# Altium PCB NIC.PCBDOC (part 1 of 2)
Units mil, origin at the board's own origin, x right, y up, seen from the top; angles counter-clockwise.
Board outline 6450 x 3500 mil, 6 copper layers (Top Layer, Internal Plane 1, MidLayer1, MidLayer2, Internal Plane 2, Bottom Layer); 176 components, 198 nets, 890 pads, 410 vias.
Unrouted connection lines stored in the file: 18.
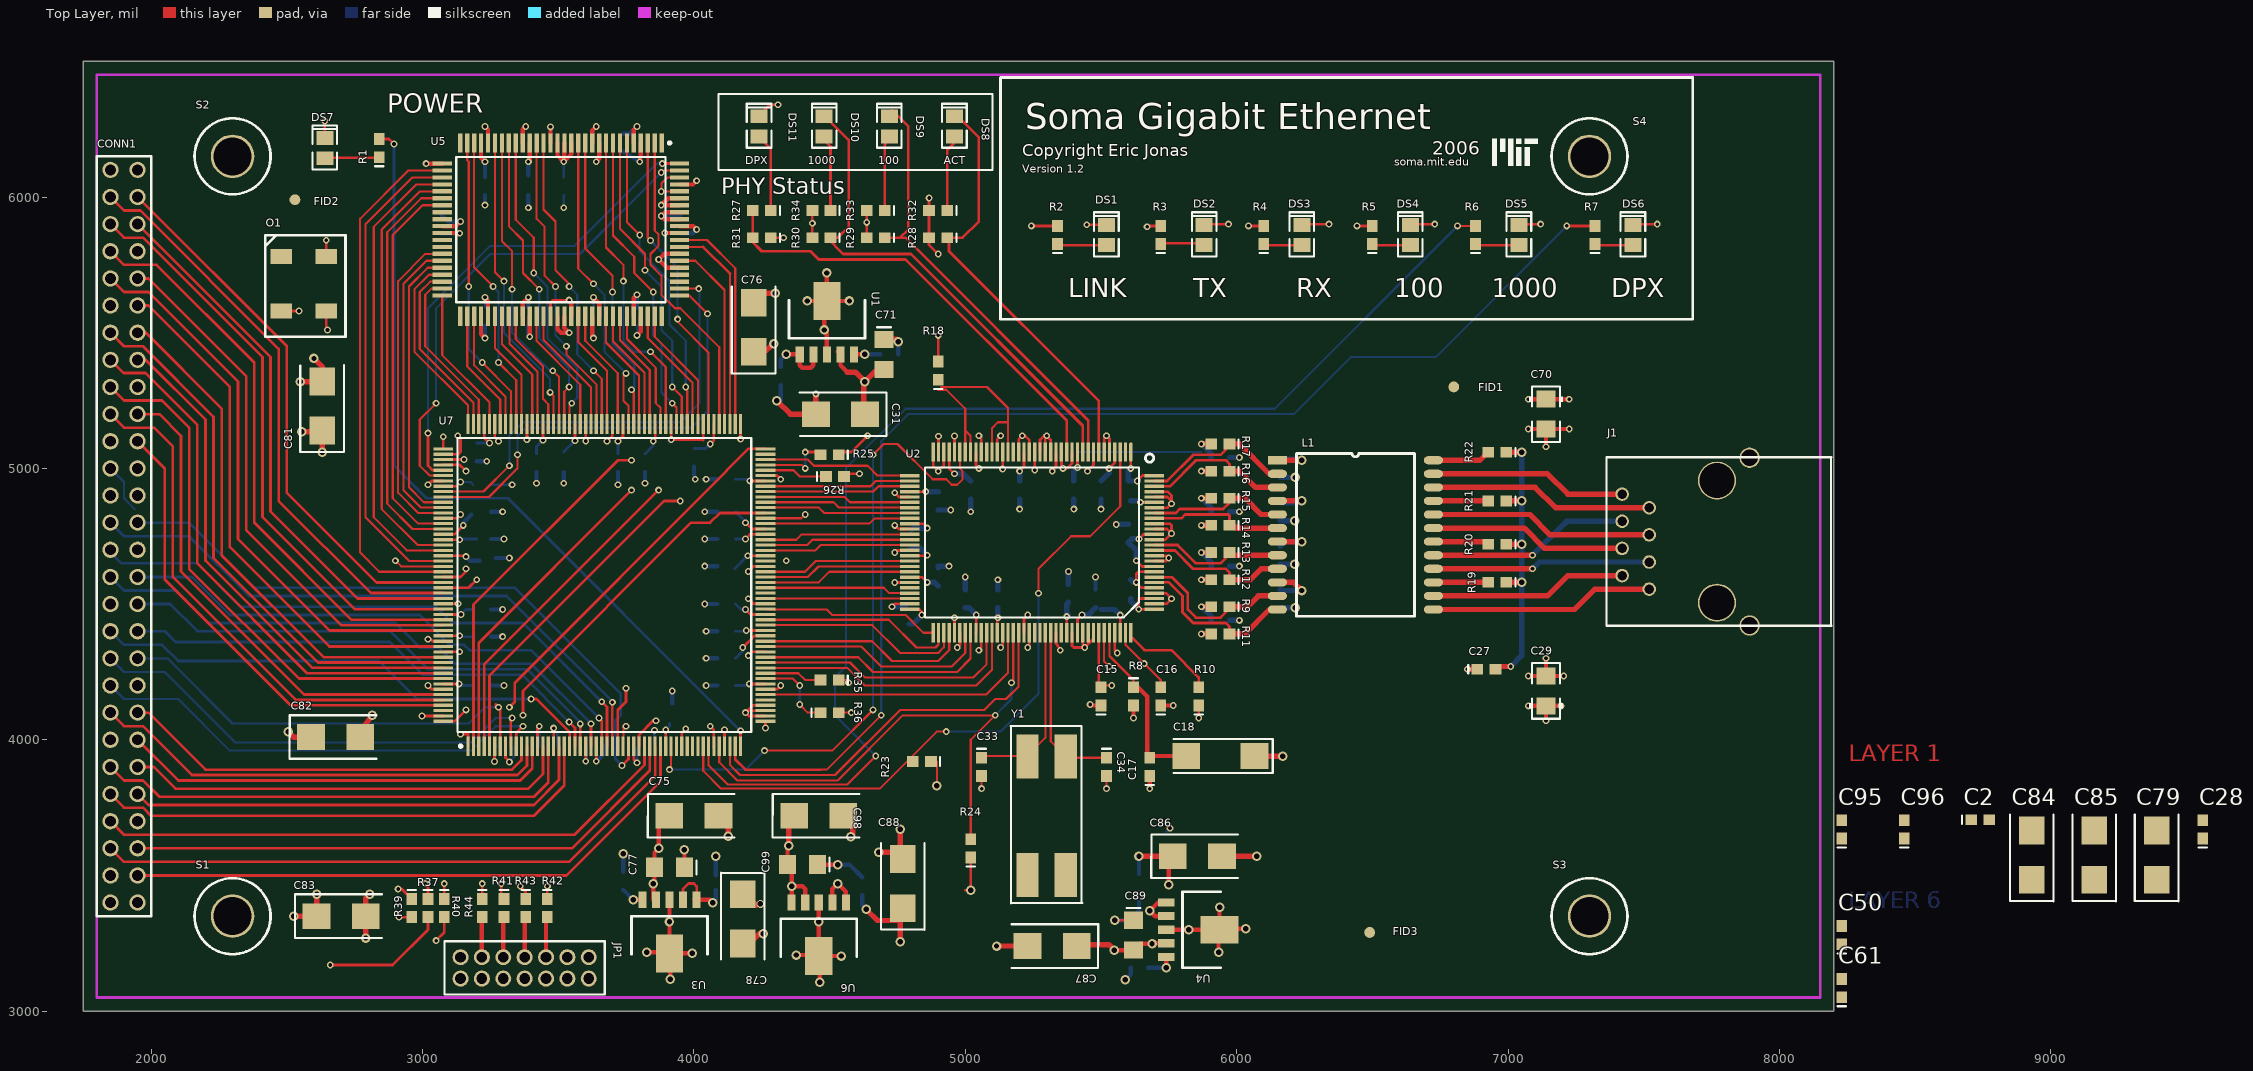
[diagram p0: Top Layer view]
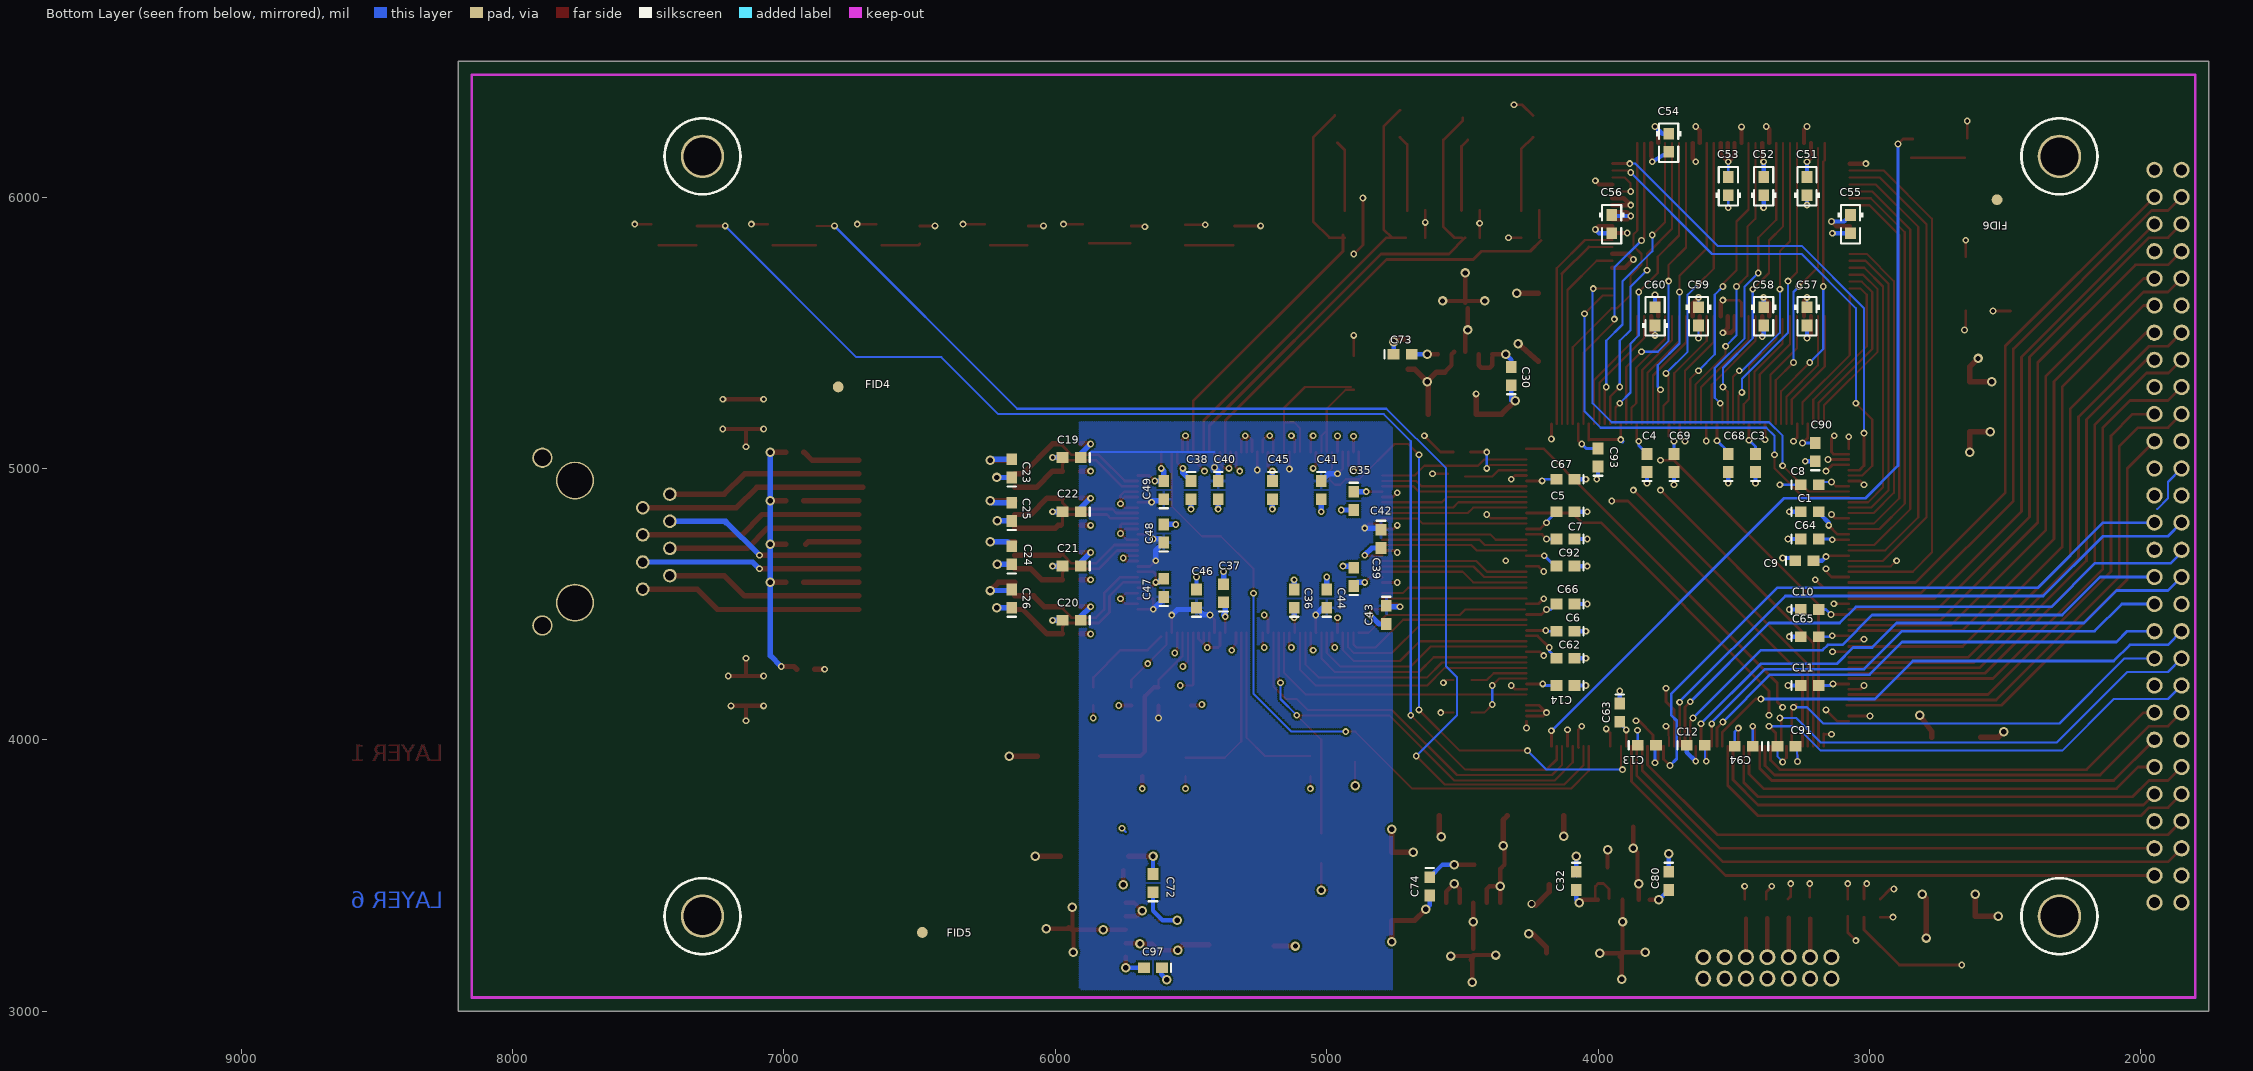
[diagram p1: Bottom Layer view, seen from below]
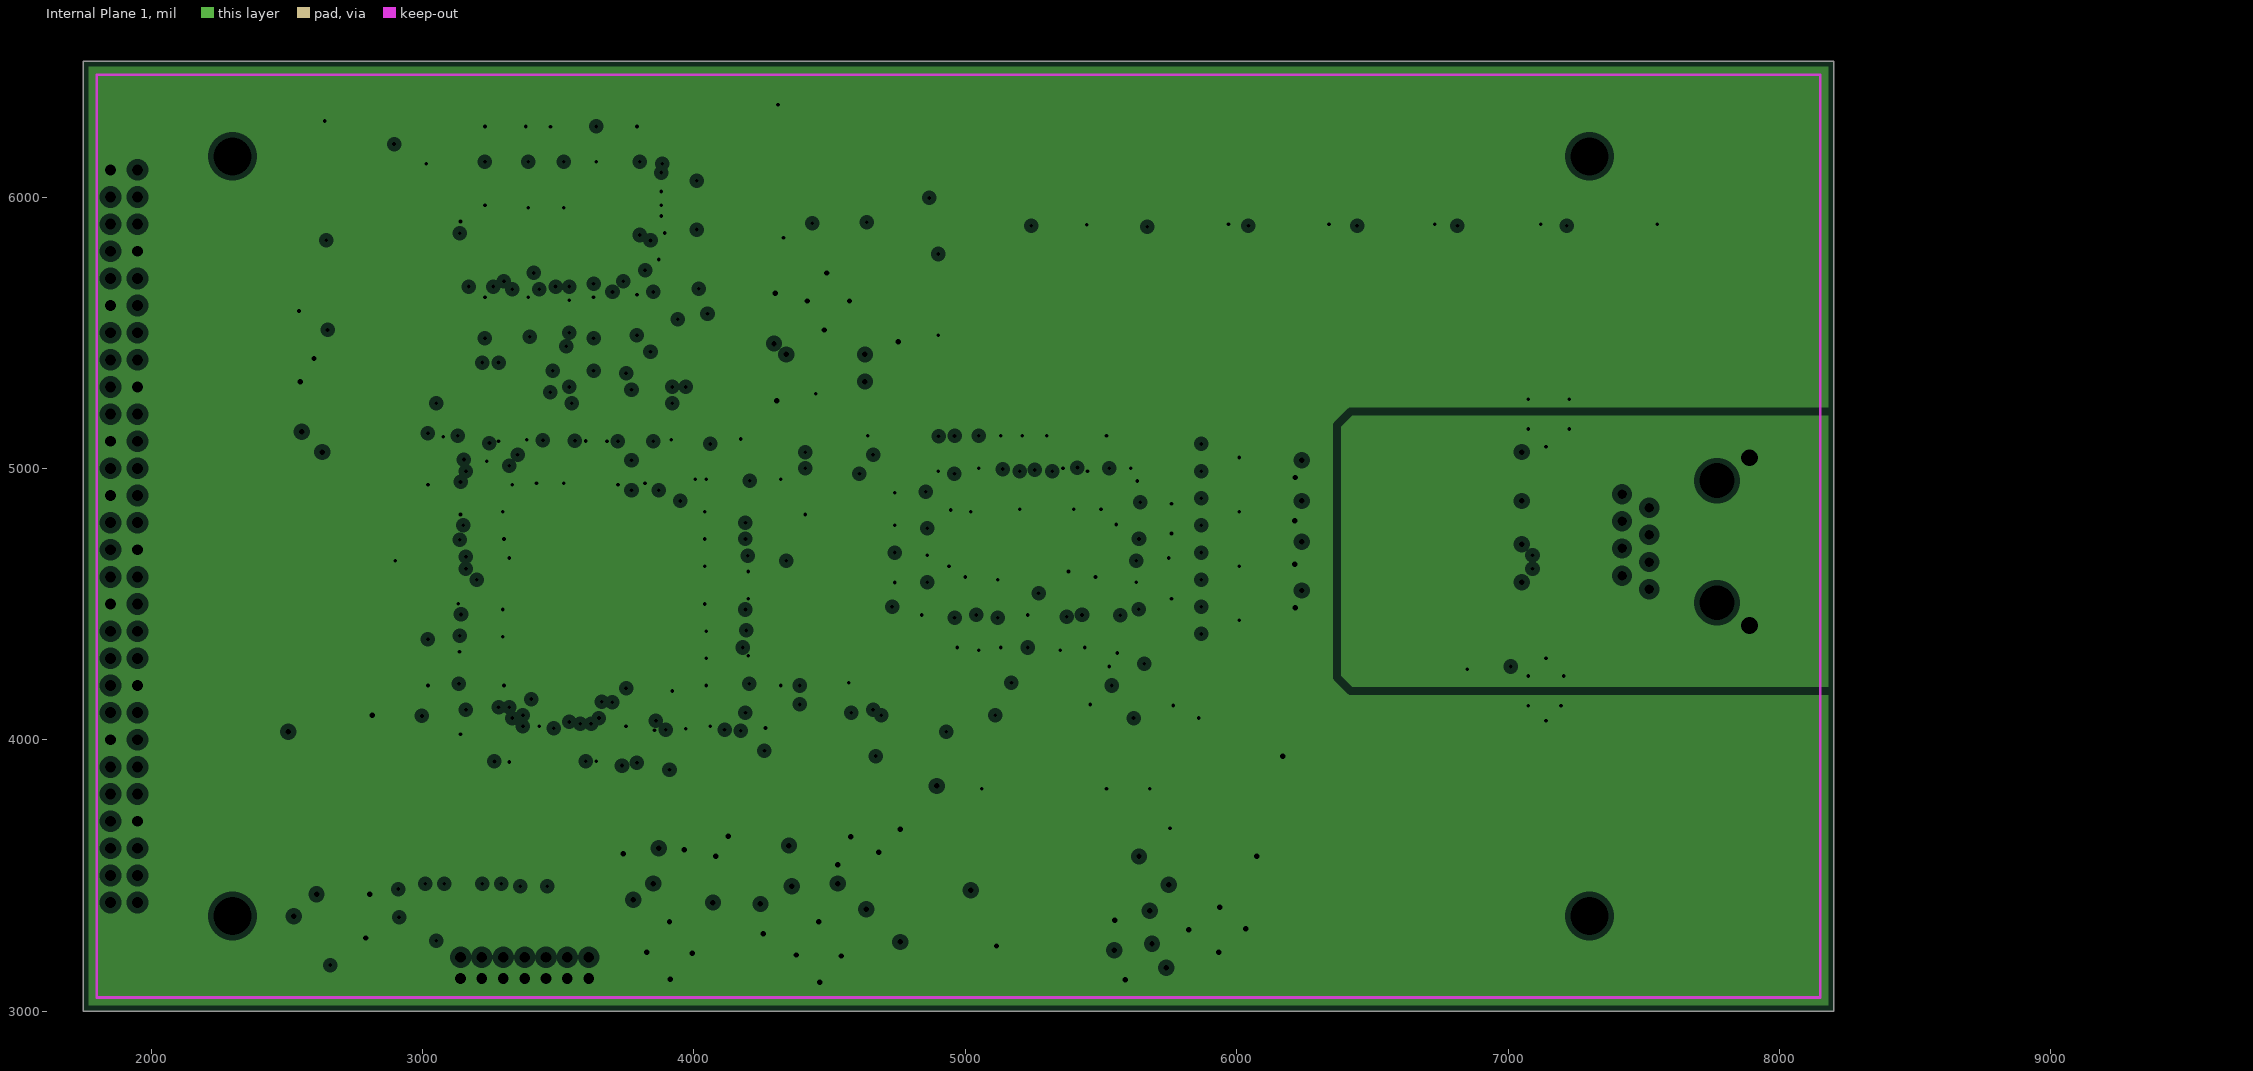
[diagram p2: Internal Plane 1, clearances drawn from the general rule]
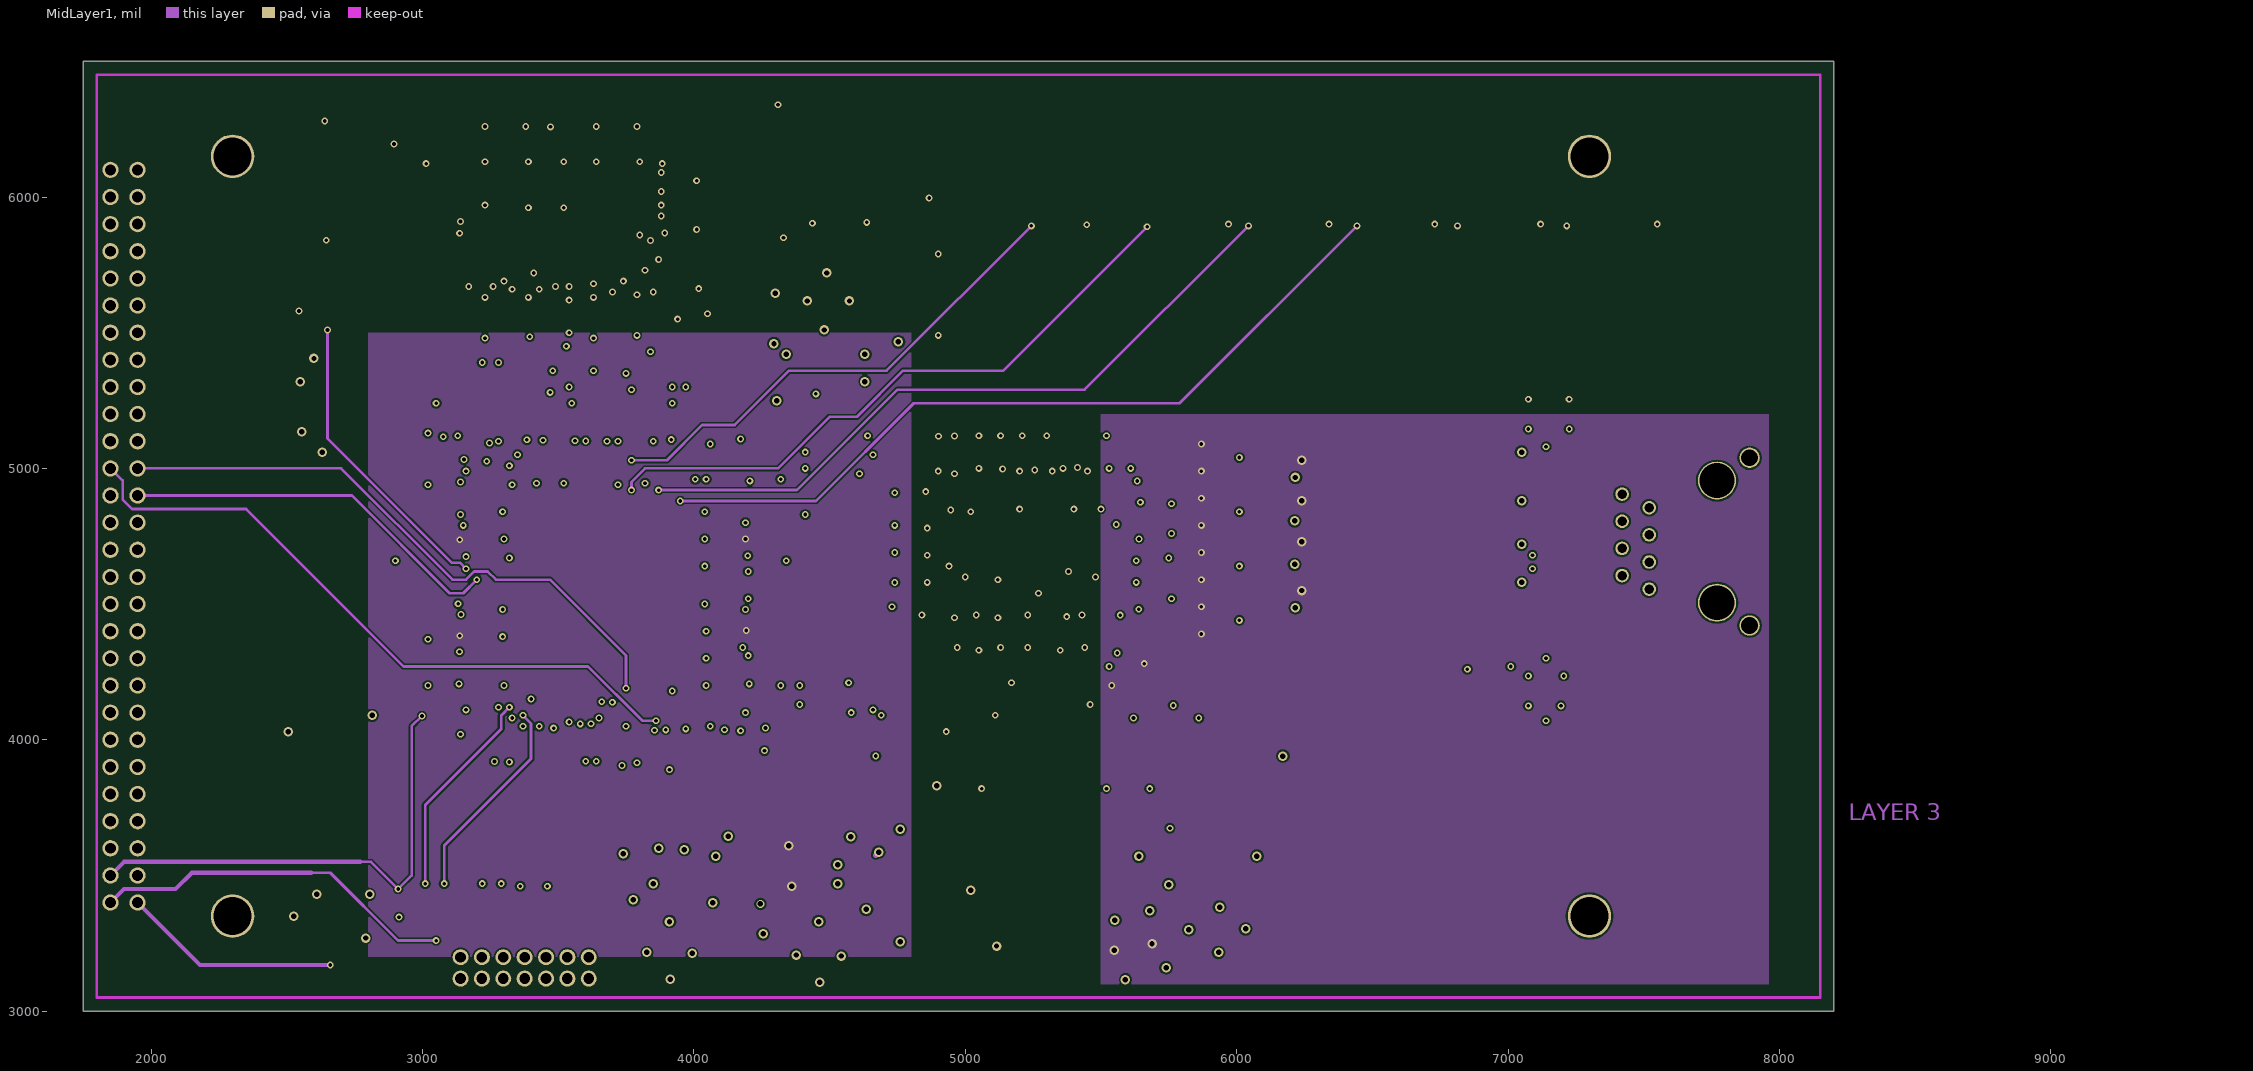
[diagram p3: MidLayer1]
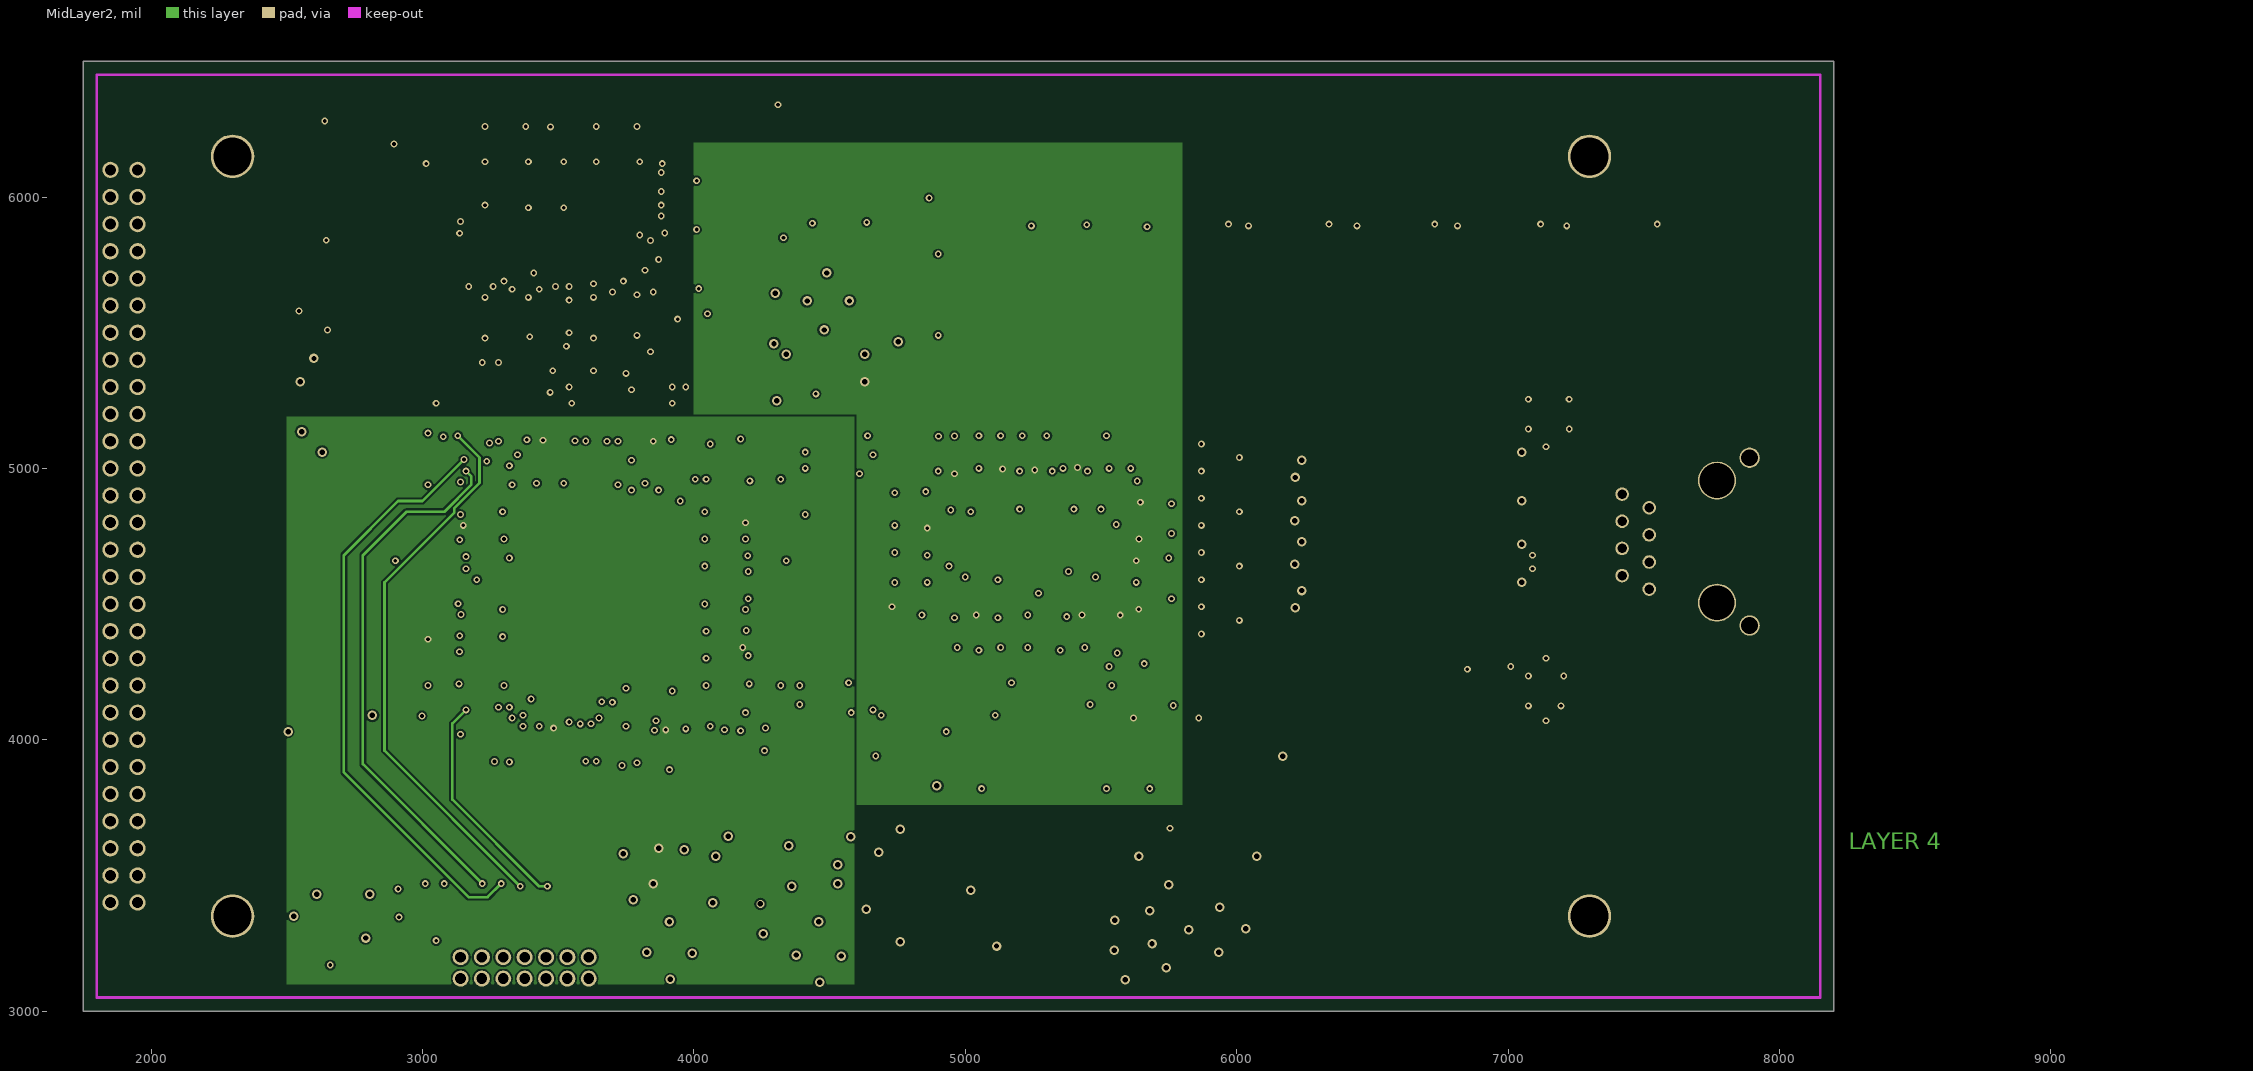
[diagram p4: MidLayer2]
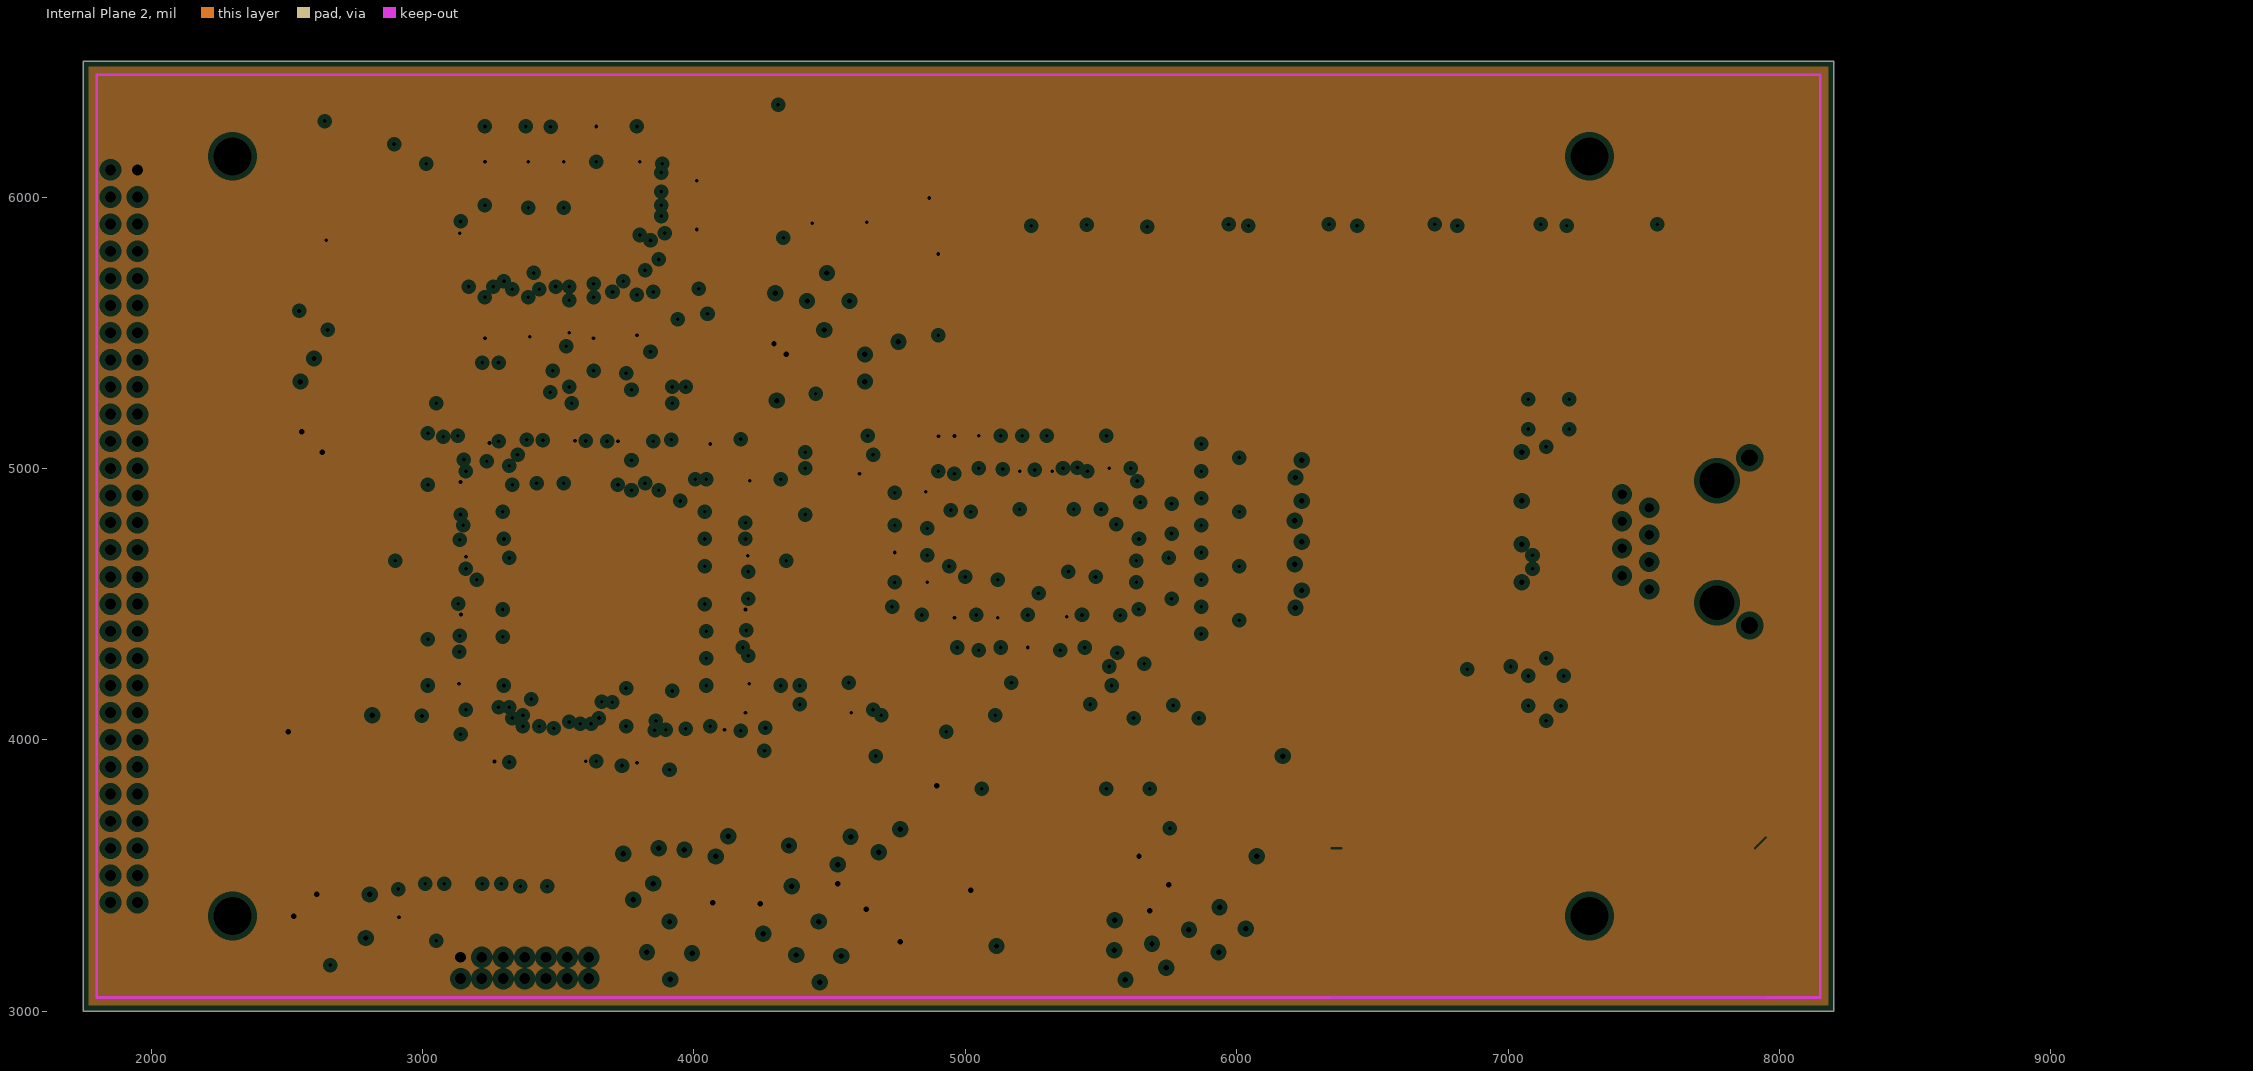
[diagram p5: Internal Plane 2, clearances drawn from the general rule]

## Layer stack, top to bottom
Top Layer: signal copper 1.4
Dielectric: core 12.6, FR-4, Dk 4.8
Internal Plane 1: plane copper 1.4, net (Multiple Nets)
Dielectric: prepreg 12.6, FR-4, Dk 4.8
MidLayer1: signal copper 1.4
Dielectric: core 12.6, FR-4, Dk 4.8
MidLayer2: signal copper 1.4
Dielectric: prepreg 12.6, FR-4, Dk 4.8
Internal Plane 2: plane copper 1.4, net (Multiple Nets)
Dielectric: core 12.6, FR-4, Dk 4.8
Bottom Layer: signal copper 1.4

## Board outline
1750,3000 8200,3000 8200,6500 1750,6500

## Design rules (kind name [scope] priority, off if disabled: settings)
Clearance [All] p1: gap=7
ComponentClearance [All] p1: gap=10 collisioncheckmode=0
HoleSize [All] p1: absolutevalues=TRUE maxlimit=200 minlimit=1 maxpercent=80.000 minpercent=20.000
PlaneClearance [All] p1: clearance=20
PlaneConnect [All] p1: planeconnectstyle=Relief reliefexpansion=20 reliefentries=4 reliefconductorwidth=10 reliefairgap=10
PolygonConnect SOT223 [(HasFootprint('SOT223-5/Simple'))] p1: connectstyle=Relief reliefconductorwidth=40 reliefentries=4 polygonreliefangle="45 Angle" // Expansion for area around the SOT223 components
PolygonConnect [All] p2: connectstyle=Relief reliefconductorwidth=10 reliefentries=4 polygonreliefangle="90 Angle"
RoomDefinition MAIN [InComponentClass('MAIN')] p1: confinementstyle=ConfineIn formatcopy=TRUE lockcomponents=FALSE outline 8000,3120 10990,3120 10990,3520 8000,3520
RoomDefinition FPGA [InComponentClass('FPGA')] p2: confinementstyle=ConfineIn formatcopy=TRUE lockcomponents=FALSE outline 8000,3140 8150,3140 8150,5360 8000,5360
RoomDefinition PHY [InComponentClass('PHY')] p3: confinementstyle=ConfineIn formatcopy=TRUE lockcomponents=FALSE outline 8000,5300 8460,5300 8460,6420 8000,6420
RoomDefinition "Power and Clocks" [InComponentClass('Power and Clocks')] p4: confinementstyle=ConfineIn formatcopy=TRUE lockcomponents=FALSE outline 8000,6360 8810,6360 8810,6880 8000,6880
RoomDefinition memory [InComponentClass('memory')] p5: confinementstyle=ConfineIn formatcopy=TRUE lockcomponents=FALSE outline 8000,6840 9190,6840 9190,6930 8000,6930
RoutingLayers [All] p1: top layer_v5=TRUE mid layer 1_v5=FALSE mid layer 2_v5=FALSE bottom layer_v5=TRUE
RoutingVias [All] p1: holewidth=13.5 width=25 viastyle="Through Hole" minholewidth=13.5 minwidth=25 maxholewidth=35 maxwidth=50
SolderMaskExpansion [All] p1: expansion=4
TestPointUsage [All] p1: valid=0 allowmultiple=FALSE
Testpoint [All] p1: side=15 testpointundercomponent=TRUE minsize=40 maxsize=100 preferedsize=60 minholesize=0 maxholesize=40 preferedholesize=32 testpointgrid=1 style=1023 order=0123456789
Width [All] p1: maxlimit=200 minlimit=7 preferedwidth=7 toplayer_prefwidth=20 midlayer1_prefwidth=10 bottomlayer_prefwidth=20 minimp=50.000000 maximp=50.000000 favimp=50.000000
13 further rules are at their usual default settings.

## Classes and differential pairs
component class FPGA: C79 C84 C85 CONN1 DS1 DS2 DS3 DS4 DS5 DS6 DS7 JP1 R1 R2 R3 R4 R5 R6 R7 R25 R26 R35 R36 R37 R39 R40 R41 R42 R43 R44 U7
component class PHY: C15 C16 C17 C18 C19 C20 C21 C22 C23 C24 C25 C26 C27 C29 C33 C34 C35 C36 C37 C38 C39 C40 C41 C42 C43 C44 C45 C46 C47 C48 C49 C50 C70 DS8 DS9 DS10 DS11 J1 L1 R8 R9 R10 R11 R12 R13 R14 R15 R16 R17 R18 R19 R20 R21 R22 R23 R24 R27 R28 R29 R30 R31 R32 R33 R34 U2 Y1
component class memory: C51 C52 C53 C54 C55 C56 C57 C58 C59 C60 C61 U5
net class A[0..16]: A0 A1 A2 A3 A4 A5 A6 A7 A8 A9 A10 A11 A12 A13 A14 A15 A16
net class DQ[0..31]: DQ0 DQ1 DQ2 DQ3 DQ4 DQ5 DQ6 DQ7 DQ8 DQ9 DQ10 DQ11 DQ12 DQ13 DQ14 DQ15 DQ16 DQ17 DQ18 DQ19 DQ20 DQ21 DQ22 DQ23 DQ24 DQ25 DQ26 DQ27 DQ28 DQ29 DQ30 DQ31
net class RXD[0..7]: RXD0 RXD1 RXD2 RXD3 RXD4 RXD5 RXD6 RXD7
net class TXD[0..7]: TXD0 TXD1 TXD2 TXD3 TXD4 TXD5 TXD6 TXD7
component class "Power and Clocks": C1 C2 C3 C4 C5 C6 C7 C8 C9 C10 C11 C12 C13 C14 C28 C30 C31 C32 C62 C63 C64 C65 C66 C67 C68 C69 C71 C72 C73 C74 C75 C76 C77 C78 C79 C80 C81 C82 C83 C84 C85 C86 C87 C88 C89 C90 C91 C92 C93 C94 C95 C96 C97 C98 C99 O1 U1 U3 U4 U6
component class MAIN: FID1 FID2 FID3 FID4 FID5 FID6 S1 S2 S3 S4

## Components (designator, comment, footprint, x,y, rotation, side; value= is the part's Value field where it differs from the comment)
C1 "Cap" 0603 3220,4840 r180 bottom
C2 "Cap" 0603 8740,3705 r0 top
C3 "Cap" 0603 3420,5020 r90 bottom
C4 "Cap" 0603 3820,5020 r90 bottom
C5 "Cap" 0603 4120,4840 r0 bottom
C6 "Cap" 0603 4120,4400 r0 bottom
C7 "Cap" 0603 4120,4740 r0 bottom
C8 "Cap" 0603 3220,4940 r180 bottom
C9 "Cap" 0603 3240,4660 r180 bottom
C10 "Cap" 0603 3220,4480 r180 bottom
C11 "Cap" 0603 3220,4200 r180 bottom
C12 "Cap" 0603 3640,3980 r180 bottom
C13 "Cap" 0603 3820,3980 r180 bottom
C14 "Cap" 0603 4120,4200 r0 bottom
C15 "Cap" 0603 5500,4160 r90 top
C16 "Cap" 0603 5720,4160 r90 top
C17 "Cap" 0603 5680,3900 r90 top
C18 "Cap" TC7343-2917 5940,3940 r180 top
C19 "Cap" 0603 5940,5040 r0 bottom
C20 "Cap" 0603 5940,4440 r0 bottom
C21 "Cap" 0603 5940,4640 r0 bottom
C22 "Cap" 0603 5940,4840 r0 bottom
C23 "Cap" 0603 6160,5000 r90 bottom
C24 "Cap" 0603 6160,4840 r90 bottom
C25 "Cap" 0603 6160,4680 r90 bottom
C26 "Cap" 0603 6160,4520 r90 bottom
C27 "Cap" 0603 6920,4260 r0 top
C28 "Cap" CC1608-0603 9560,3670 r90 top
C29 "Cap" CC3216-1206 7140,4180 r90 top
C30 "Cap" CC1608-0603 4320,5340 r90 bottom
C31 "POLCAP2" 6032 4540,5200 r180 top
C32 "Cap" CC1608-0603 4080,3480 r270 bottom
C33 "8 pF" 0603 5060,3900 r270 top
C34 "8 pF" 0603 5520,3900 r270 top
C35 "Cap" 0603 4900,4880 r270 bottom
C36 "Cap" 0603 5120,4520 r90 bottom
C37 "Cap" 0603 5380,4540 r90 bottom
C38 "Cap" 0603 5500,4920 r270 bottom
C39 "Cap" 0603 4900,4600 r90 bottom
C40 "Cap" 0603 5400,4920 r270 bottom
C41 "Cap" 0603 5020,4920 r270 bottom
C42 "Cap" 0603 4800,4740 r270 bottom
C43 "Cap" 0603 4780,4460 r270 bottom
C44 "Cap" 0603 5000,4520 r90 bottom
C45 "Cap" 0603 5200,4920 r270 bottom
C46 "Cap" 0603 5480,4520 r90 bottom
C47 "Cap" 0603 5600,4560 r90 bottom
C48 "Cap" 0603 5600,4760 r90 bottom
C49 "Cap" 0603 5600,4920 r90 bottom
C50 "Cap" 0603 8230,3280 r90 top
C51 "Cap" CC1608-0603 3230,6040 r90 bottom
C52 "Cap" CC1608-0603 3390,6040 r90 bottom
C53 "Cap" CC1608-0603 3520,6040 r90 bottom
C54 "Cap" CC1608-0603 3740,6200 r270 bottom
C55 "Cap" CC1608-0603 3070,5900 r270 bottom
C56 "Cap" CC1608-0603 3950,5900 r270 bottom
C57 "Cap" CC1608-0603 3230,5560 r270 bottom
C58 "Cap" CC1608-0603 3390,5560 r270 bottom
C59 "Cap" CC1608-0603 3630,5560 r270 bottom
C60 "Cap" CC1608-0603 3790,5560 r90 bottom
C61 "Cap" CC1608-0603 8230,3085 r90 top
C62 "Cap" 0603 4120,4300 r0 bottom
C63 "Cap" 0603 3920,4100 r270 bottom
C64 "Cap" 0603 3220,4740 r180 bottom
C65 "Cap" 0603 3220,4380 r180 bottom
C66 "Cap" 0603 4120,4500 r0 bottom
C67 "Cap" 0603 4120,4960 r0 bottom
C68 "Cap" 0603 3520,5020 r90 bottom
C69 "Cap" 0603 3720,5020 r90 bottom
C70 "Cap" CC3216-1206 7140,5200 r270 top
C71 "Cap" 1206 4700,5420 r270 top
C72 "Cap" CC1608-0603 5640,3471.75 r90 bottom
C73 "Cap" 0603 4720,5420 r180 bottom
C74 "Cap" CC1608-0603 4620,3460 r270 bottom
C75 "POLCAP2" 6032 4000,3720 r0 top
C76 "POLCAP2" 6032 4220,5520 r90 top
C77 "Cap" 1206 3910,3530 r180 top
C78 "POLCAP2" 6032 4180,3340 r270 top
C79 "Tantalum" 6032 9390,3575 r90 top
C80 "Cap" 0603 3740,3480 r270 bottom
C81 "Tantalum" 6032 2630,5230 r90 top
C82 "Tantalum" 6032 2680,4010 r0 top
C83 "Tantalum" 6032 2700,3350 r0 top
C84 "Tantalum" 6032 8930,3575 r90 top
C85 "Tantalum" 6032 9160,3575 r90 top
C86 "POLCAP2" 6032 5855.12,3570.88 r0 top
C87 "POLCAP2" 6032 5320,3240 r180 top
C88 "POLCAP2" 6032 4770,3470 r90 top
C89 "Cap" 1206 5620,3280 r270 top
C90 "Cap" 0603 3200,5060 r90 bottom (schematic designator C?)
C91 "Cap" 0603 3305.83,3976.5 r180 bottom (schematic designator C?)
C92 "Cap" 0603 4120,4640 r0 bottom (schematic designator C?)
C93 "Cap" 0603 4000,5040 r90 bottom (schematic designator C?)
C94 "Cap" 0603 3463.31,3976.5 r0 bottom
C95 "Cap" 0603 8230,3670 r90 top
C96 "Cap" 0603 8460,3670 r90 top
C97 "Cap" 0603 5640,3160 r0 bottom
C98 "POLCAP2" 6032 4460,3720 r0 top
C99 "Cap" 1206 4400,3540 r180 top
CONN1 "CON56B" HDR56F 1850,6100 r90 top locked
DS1 "LED3" "SMD _LED" 5520,5860 r270 top
DS2 "LED3" "SMD _LED" 5880,5860 r270 top
DS3 "LED3" "SMD _LED" 6240,5860 r270 top
DS4 "LED3" "SMD _LED" 6640,5860 r270 top
DS5 "LED3" "SMD _LED" 7040,5860 r270 top
DS6 "LED3" "SMD _LED" 7460,5860 r270 top
DS7 "LED3" "SMD _LED" 2640,6180 r270 top
DS8 "LED3" "SMD _LED" 4960,6260 r270 top
DS9 "LED3" "SMD _LED" 4720,6260 r270 top
DS10 "LED3" "SMD _LED" 4480,6260 r270 top
DS11 "LED3" "SMD _LED" 4240,6260 r270 top
FID1 "FIDUCIAL" FIDUCIAL 6800,5300 r90 top
FID2 "FIDUCIAL" FIDUCIAL 2530,5990 r90 top
FID3 "FIDUCIAL" FIDUCIAL 6490,3290 r90 top
FID4 "FIDUCIAL" FIDUCIAL 6800,5300 r270 bottom
FID5 "FIDUCIAL" FIDUCIAL 6490,3290 r270 bottom
FID6 "FIDUCIAL" FIDUCIAL 2530,5990 r270 bottom
J1 "RJ45" MOLEXRJ45_44050-0007 7770,4730 r180 top
JP1 "Header 7X2" HDR2x7-2mm 3140,3120 r270 top
L1 "S558-5999-P3" S558-5999-P3 6150,5030 r0 top
O1 "OSC2" ECS-3953M 2480,5780 r270 top
R1 "RESISTOR" 0603 2840,6180 r90 top
R2 "RESISTOR" 0603 5340,5860 r90 top
R3 "RESISTOR" 0603 5720,5860 r90 top
R4 "RESISTOR" 0603 6100,5860 r90 top
R5 "RESISTOR" 0603 6500,5860 r90 top
R6 "RESISTOR" 0603 6880,5860 r90 top
R7 "RESISTOR" 0603 7320,5860 r90 top
R8 "Res1" 0603 5620,4160 r270 top
R9 "RESISTOR" 0603 5940,4490 r180 top
R10 "Res1" 0603 5860,4160 r90 top
R11 "RESISTOR" 0603 5940,4390 r180 top
R12 "RESISTOR" 0603 5940,4590 r180 top
R13 "RESISTOR" 0603 5940,4690 r180 top
R14 "RESISTOR" 0603 5940,4790 r180 top
R15 "RESISTOR" 0603 5940,4890 r180 top
R16 "RESISTOR" 0603 5940,4990 r180 top
R17 "RESISTOR" 0603 5940,5090 r180 top
R18 "RESISTOR" 0603 4900,5360 r90 top
R19 "Res1" 0603 6960,4580 r180 top
R20 "Res1" 0603 6960,4720 r180 top
R21 "Res1" 0603 6960,4880 r180 top
R22 "Res1" 0603 6960,5060 r180 top
R23 "RESISTOR" 0603 4840,3920 r180 top
R24 "RESISTOR" 0603 5020,3600 r90 top
R25 "DCI Resistor" 0603 4500,5050 r180 top
R26 "DCI Resistor" 0603 4520,4970 r0 top
R27 "Res1" 0603 4250,5950 r180 top
R28 "RESISTOR" 0603 4900,5850 r180 top
R29 "RESISTOR" 0603 4670,5850 r180 top
R30 "RESISTOR" 0603 4470,5850 r180 top
R31 "RESISTOR" 0603 4250,5850 r180 top
R32 "Res1" 0603 4900,5950 r180 top
R33 "Res1" 0603 4670,5950 r180 top
R34 "Res1" 0603 4470,5950 r180 top
R35 "DCI Resistor" 0603 4500,4220 r180 top
R36 "DCI Resistor" 0603 4500,4100 r0 top
R37 "Limit R" 0603 3020,3380 r270 top
R39 "Pullup" 0603 2960,3380 r270 top
R40 "Limit R" 0603 3080,3380 r270 top
R41 "RESISTOR" 0603 3300,3380 r270 top
R42 "RESISTOR" 0603 3460,3380 r270 top
R43 "RESISTOR" 0603 3380,3380 r270 top
R44 "RESISTOR" 0603 3220,3380 r270 top
S1 "6-32 Mounting Screw" SCREW6-32 2300,3350 r0 top locked
S2 "6-32 Mounting Screw" SCREW6-32 2300,6150 r0 top locked
S3 "6-32 Mounting Screw" SCREW6-32 7300,3350 r0 top locked
S4 "6-32 Mounting Screw" SCREW6-32 7300,6150 r0 top locked
U1 "TPS79518" SOT223-5/Simple 4490,5420 r0 top
U2 "DP83865" PQFP128RECT 5610,5060 r180 top locked
U3 "TPS79525" SOT223-5/Simple 3910,3410 r180 top
U4 "TPS79525" SOT223-5/Simple 5740,3300 r270 top
U5 "CY7C1350B" R-QFP14x20-G100/N 3510,5880 r270 top
U6 "TPS79501" SOT223-5/Simple 4460,3400 r180 top
U7 "XC3S-PQ208" F-QFP28X28-G208/Z32N 3670,4570 r90 top locked
Y1 "25.000MHZ 18PF SMD" EPSON_MA-506 5300,3720 r270 top

## Footprints (in the part's own frame and the unit in brackets; to place one, negate y for a bottom-side part, rotate by r counter-clockwise, add the part's x,y. Pads: shape width x height; smd on the part's side, far side on the other; paste and mask are expansions set on the pad)
0603 [mm] "Standard-sized 0603 Passive"
  rect 1.1x1 smd: 1(-0.85,0) 2(0.85,0)
  silkscreen extent -1.7,-0.4 -1.7,0.4
1206 [mm] "Standard-sized 1206 Passive"
  rect 1.6x1.8 smd: 1(-1.4,0) 2(1.4,0)
  silkscreen extent -2.53,-0.65 -2.53,0.65
6032 [mm] "Standard-Sized 7343 Polarized Leadless Cap"
  rect 2.6x2.4 smd: 1(-2.3,0) 2(2.3,0)
  silkscreen extent -4.32,-2.03 3.81,2.05
CC1608-0603 [mm] "Chip Capacitor; Body 1.6 x 0.8 mm (LxW typ)"
  rect 1.1x1 smd: 1(-0.85,0) 2(0.85,0)
  silkscreen extent -1.7,-0.4 -1.7,0.4
CC3216-1206 [mm]
  rect 1.6x1.8 smd: 1(-1.4,0) 2(1.4,0)
  silkscreen extent -2.6,-1.6 2.6,1.6
ECS-3953M [mm] "ECS SMD CLOCK OSCILLATOR"
  rect 1.4x2 smd: 1(0,0) 2(5.08,0) 3(5.08,4.2) 4(0,4.2)
  silkscreen extent -2,-1.5 7.5,6
EPSON_MA-506 [mm]
  rect 4.1x2.1 smd: 0(5.55,-1.8) 0(5.55,1.8) 1(-5.55,-1.8) 2(-5.55,1.8)
  silkscreen extent -8.41,-3.38 8.19,3.33
F-QFP28X28-G208/Z32N [mm]
  rect 1.85x0.3 smd: 1(-15.075,12.75) 2(-15.075,12.25) 3(-15.075,11.75) 4(-15.075,11.25) 5(-15.075,10.75) 6(-15.075,10.25) 7(-15.075,9.75) 8(-15.075,9.25) 9(-15.075,8.75) 10(-15.075,8.25) 11(-15.075,7.75) 12(-15.075,7.25) 13(-15.075,6.75) 14(-15.075,6.25) 15(-15.075,5.75) 16(-15.075,5.25) 17(-15.075,4.75) 18(-15.075,4.25) 19(-15.075,3.75) 20(-15.075,3.25) 21(-15.075,2.75) 22(-15.075,2.25) 23(-15.075,1.75) 24(-15.075,1.25) 25(-15.075,0.75) 26(-15.075,0.25) 27(-15.075,-0.25) 28(-15.075,-0.75) 29(-15.075,-1.25) 30(-15.075,-1.75) 31(-15.075,-2.25) 32(-15.075,-2.75) 33(-15.075,-3.25) 34(-15.075,-3.75) 35(-15.075,-4.25) 36(-15.075,-4.75) 37(-15.075,-5.25) 38(-15.075,-5.75) 39(-15.075,-6.25) 40(-15.075,-6.75) 41(-15.075,-7.25) 42(-15.075,-7.75) 43(-15.075,-8.25) 44(-15.075,-8.75) 45(-15.075,-9.25) 46(-15.075,-9.75) 47(-15.075,-10.25) 48(-15.075,-10.75) 49(-15.075,-11.25) 50(-15.075,-11.75) 51(-15.075,-12.25) 52(-15.075,-12.75) 105(15.075,-12.75) 106(15.075,-12.25) 107(15.075,-11.75) 108(15.075,-11.25) 109(15.075,-10.75) 110(15.075,-10.25) 111(15.075,-9.75) 112(15.075,-9.25) 113(15.075,-8.75) 114(15.075,-8.25) 115(15.075,-7.75) 116(15.075,-7.25) 117(15.075,-6.75) 118(15.075,-6.25) 119(15.075,-5.75) 120(15.075,-5.25) 121(15.075,-4.75) 122(15.075,-4.25) 123(15.075,-3.75) 124(15.075,-3.25) 125(15.075,-2.75) 126(15.075,-2.25) 127(15.075,-1.75) 128(15.075,-1.25) 129(15.075,-0.75) 130(15.075,-0.25) 131(15.075,0.25) 132(15.075,0.75) 133(15.075,1.25) 134(15.075,1.75) 135(15.075,2.25) 136(15.075,2.75) 137(15.075,3.25) 138(15.075,3.75) 139(15.075,4.25) 140(15.075,4.75) 141(15.075,5.25) 142(15.075,5.75) 143(15.075,6.25) 144(15.075,6.75) 145(15.075,7.25) 146(15.075,7.75) 147(15.075,8.25) 148(15.075,8.75) 149(15.075,9.25) 150(15.075,9.75) 151(15.075,10.25) 152(15.075,10.75) 153(15.075,11.25) 154(15.075,11.75) 155(15.075,12.25) 156(15.075,12.75)
  rect 0.3x1.85 smd: 53(-12.75,-15.075) 54(-12.25,-15.075) 55(-11.75,-15.075) 56(-11.25,-15.075) 57(-10.75,-15.075) 58(-10.25,-15.075) 59(-9.75,-15.075) 60(-9.25,-15.075) 61(-8.75,-15.075) 62(-8.25,-15.075) 63(-7.75,-15.075) 64(-7.25,-15.075) 65(-6.75,-15.075) 66(-6.25,-15.075) 67(-5.75,-15.075) 68(-5.25,-15.075) 69(-4.75,-15.075) 70(-4.25,-15.075) 71(-3.75,-15.075) 72(-3.25,-15.075) 73(-2.75,-15.075) 74(-2.25,-15.075) 75(-1.75,-15.075) 76(-1.25,-15.075) 77(-0.75,-15.075) 78(-0.25,-15.075) 79(0.25,-15.075) 80(0.75,-15.075) 81(1.25,-15.075) 82(1.75,-15.075) 83(2.25,-15.075) 84(2.75,-15.075) 85(3.25,-15.075) 86(3.75,-15.075) 87(4.25,-15.075) 88(4.75,-15.075) 89(5.25,-15.075) 90(5.75,-15.075) 91(6.25,-15.075) 92(6.75,-15.075) 93(7.25,-15.075) 94(7.75,-15.075) 95(8.25,-15.075) 96(8.75,-15.075) 97(9.25,-15.075) 98(9.75,-15.075) 99(10.25,-15.075) 100(10.75,-15.075) 101(11.25,-15.075) 102(11.75,-15.075) 103(12.25,-15.075) 104(12.75,-15.075) 157(12.75,15.075) 158(12.25,15.075) 159(11.75,15.075) 160(11.25,15.075) 161(10.75,15.075) 162(10.25,15.075) 163(9.75,15.075) 164(9.25,15.075) 165(8.75,15.075) 166(8.25,15.075) 167(7.75,15.075) 168(7.25,15.075) 169(6.75,15.075) 170(6.25,15.075) 171(5.75,15.075) 172(5.25,15.075) 173(4.75,15.075) 174(4.25,15.075) 175(3.75,15.075) 176(3.25,15.075) 177(2.75,15.075) 178(2.25,15.075) 179(1.75,15.075) 180(1.25,15.075) 181(0.75,15.075) 182(0.25,15.075) 183(-0.25,15.075) 184(-0.75,15.075) 185(-1.25,15.075) 186(-1.75,15.075) 187(-2.25,15.075) 188(-2.75,15.075) 189(-3.25,15.075) 190(-3.75,15.075) 191(-4.25,15.075) 192(-4.75,15.075) 193(-5.25,15.075) 194(-5.75,15.075) 195(-6.25,15.075) 196(-6.75,15.075) 197(-7.25,15.075) 198(-7.75,15.075) 199(-8.25,15.075) 200(-8.75,15.075) 201(-9.25,15.075) 202(-9.75,15.075) 203(-10.25,15.075) 204(-10.75,15.075) 205(-11.25,15.075) 206(-11.75,15.075) 207(-12.25,15.075) 208(-12.75,15.075)
  silkscreen extent -15.2,-13.75 13.75,13.75
FIDUCIAL [mil] "Fiducial footprint as recommended by PCBpro"
  round 40 smd paste-20 mask+30: 0(0,0)
HDR2x7-2mm [mm]
  round 1.5 hole 1: 1(0,0) 2(-2,0) 3(0,2) 4(-2,2) 5(0,4) 6(-2,4) 7(0,6) 8(-2,6) 9(0,8) 10(-2,8) 11(0,10) 12(-2,10) 13(0,12) 14(-2,12)
  silkscreen extent -3.5,-1.5 1.5,13.5
HDR56F [mil]
  round 60 hole 40: 1(0,-100) 2(0,0) 3(-100,-100) 4(-100,0) 5(-200,-100) 6(-200,0) 7(-300,-100) 8(-300,0) 9(-400,-100) 10(-400,0) 11(-500,-100) 12(-500,0) 13(-600,-100) 14(-600,0) 15(-700,-100) 16(-700,0) 17(-800,-100) 18(-800,0) 19(-900,-100) 20(-900,0) 21(-1000,-100) 22(-1000,0) 23(-1100,-100) 24(-1100,0) 25(-1200,-100) 26(-1200,0) 27(-1300,-100) 28(-1300,0) 29(-1400,-100) 30(-1400,0) 31(-1500,-100) 32(-1500,0) 33(-1600,-100) 34(-1600,0) 35(-1700,-100) 36(-1700,0) 37(-1800,-100) 38(-1800,0) 39(-1900,-100) 40(-1900,0) 41(-2000,-100) 42(-2000,0) 43(-2100,-100) 44(-2100,0) 45(-2200,-100) 46(-2200,0) 47(-2300,-100) 48(-2300,0) 49(-2400,-100) 50(-2400,0) 51(-2500,-100) 52(-2500,0) 53(-2600,-100) 54(-2600,0) 55(-2700,0) 56(-2700,-100)
  silkscreen extent -2750,-150 50,50
MOLEXRJ45_44050-0007 [mil]
  round 140 hole 128: 0(0,225) 0(0,-225)
  round 50 hole 35: 1(250,175) 2(350,125) 3(250,75) 4(350,25) 5(250,-25) 6(350,-75) 7(250,-125) 8(350,-175)
  round 75 hole 62: 9(-120,309) 9(-120,-309)
  silkscreen extent -422,-311 407,311
PQFP128RECT [mm]
  oval 0.31x1.8 smd: 1(0,0)
  rect 0.31x1.8 smd: 2(0.5,0) 3(1,0) 4(1.5,0) 5(2,0) 6(2.5,0) 7(3,0) 8(3.5,0) 9(4,0) 10(4.5,0) 11(5,0) 12(5.5,0) 13(6,0) 14(6.5,0) 15(7,0) 16(7.5,0) 17(8,0) 18(8.5,0) 19(9,0) 20(9.5,0) 21(10,0) 22(10.5,0) 23(11,0) 24(11.5,0) 25(12,0) 26(12.5,0) 27(13,0) 28(13.5,0) 29(14,0) 30(14.5,0) 31(15,0) 32(15.5,0) 33(16,0) 34(16.5,0) 35(17,0) 36(17.5,0) 37(18,0) 38(18.5,0) 65(18.5,16.9) 66(18,16.9) 67(17.5,16.9) 68(17,16.9) 69(16.5,16.9) 70(16,16.9) 71(15.5,16.9) 72(15,16.9) 73(14.5,16.9) 74(14,16.9) 75(13.5,16.9) 76(13,16.9) 77(12.5,16.9) 78(12,16.9) 79(11.5,16.9) 80(11,16.9) 81(10.5,16.9) 82(10,16.9) 83(9.5,16.9) 84(9,16.9) 85(8.5,16.9) 86(8,16.9) 87(7.5,16.9) 88(7,16.9) 89(6.5,16.9) 90(6,16.9) 91(5.5,16.9) 92(5,16.9) 93(4.5,16.9) 94(4,16.9) 95(3.5,16.9) 96(3,16.9) 97(2.5,16.9) 98(2,16.9) 99(1.5,16.9) 100(1,16.9) 101(0.5,16.9) 102(0,16.9)
  rect 1.8x0.31 smd: 39(20.7,2.2) 40(20.7,2.7) 41(20.7,3.2) 42(20.7,3.7) 43(20.7,4.2) 44(20.7,4.7) 45(20.7,5.2) 46(20.7,5.7) 47(20.7,6.2) 48(20.7,6.7) 49(20.7,7.2) 50(20.7,7.7) 51(20.7,8.2) 52(20.7,8.7) 53(20.7,9.2) 54(20.7,9.7) 55(20.7,10.2) 56(20.7,10.7) 57(20.7,11.2) 58(20.7,11.7) 59(20.7,12.2) 60(20.7,12.7) 61(20.7,13.2) 62(20.7,13.7) 63(20.7,14.2) 64(20.7,14.7) 103(-2.2,14.7) 104(-2.2,14.2) 105(-2.2,13.7) 106(-2.2,13.2) 107(-2.2,12.7) 108(-2.2,12.2) 109(-2.2,11.7) 110(-2.2,11.2) 111(-2.2,10.7) 112(-2.2,10.2) 113(-2.2,9.7) 114(-2.2,9.2) 115(-2.2,8.7) 116(-2.2,8.2) 117(-2.2,7.7) 118(-2.2,7.2) 119(-2.2,6.7) 120(-2.2,6.2) 121(-2.2,5.7) 122(-2.2,5.2) 123(-2.2,4.7) 124(-2.2,4.2) 125(-2.2,3.7) 126(-2.2,3.2) 127(-2.2,2.7) 128(-2.2,2.2)
  silkscreen extent -2.14,0.17 19.26,15.46
R-QFP14x20-G100/N [mm]
  rect 1.8x0.4 smd: 1(-8.105,9.425) 2(-8.105,8.775) 3(-8.105,8.125) 4(-8.105,7.475) 5(-8.105,6.825) 6(-8.105,6.175) 7(-8.105,5.525) 8(-8.105,4.875) 9(-8.105,4.225) 10(-8.105,3.575) 11(-8.105,2.925) 12(-8.105,2.275) 13(-8.105,1.625) 14(-8.105,0.975) 15(-8.105,0.325) 16(-8.105,-0.325) 17(-8.105,-0.975) 18(-8.105,-1.625) 19(-8.105,-2.275) 20(-8.105,-2.925) 21(-8.105,-3.575) 22(-8.105,-4.225) 23(-8.105,-4.875) 24(-8.105,-5.525) 25(-8.105,-6.175) 26(-8.105,-6.825) 27(-8.105,-7.475) 28(-8.105,-8.125) 29(-8.105,-8.775) 30(-8.105,-9.425) 51(8.105,-9.425) 52(8.105,-8.775) 53(8.105,-8.125) 54(8.105,-7.475) 55(8.105,-6.825) 56(8.105,-6.175) 57(8.105,-5.525) 58(8.105,-4.875) 59(8.105,-4.225) 60(8.105,-3.575) 61(8.105,-2.925) 62(8.105,-2.275) 63(8.105,-1.625) 64(8.105,-0.975) 65(8.105,-0.325) 66(8.105,0.325) 67(8.105,0.975) 68(8.105,1.625) 69(8.105,2.275) 70(8.105,2.925) 71(8.105,3.575) 72(8.105,4.225) 73(8.105,4.875) 74(8.105,5.525) 75(8.105,6.175) 76(8.105,6.825) 77(8.105,7.475) 78(8.105,8.125) 79(8.105,8.775) 80(8.105,9.425)
  rect 0.4x1.8 smd: 31(-6.175,-11.105) 32(-5.525,-11.105) 33(-4.875,-11.105) 34(-4.225,-11.105) 35(-3.575,-11.105) 36(-2.925,-11.105) 37(-2.275,-11.105) 38(-1.625,-11.105) 39(-0.975,-11.105) 40(-0.325,-11.105) 41(0.325,-11.105) 42(0.975,-11.105) 43(1.625,-11.105) 44(2.275,-11.105) 45(2.925,-11.105) 46(3.575,-11.105) 47(4.225,-11.105) 48(4.875,-11.105) 49(5.525,-11.105) 50(6.175,-11.105) 81(6.175,11.105) 82(5.525,11.105) 83(4.875,11.105) 84(4.225,11.105) 85(3.575,11.105) 86(2.925,11.105) 87(2.275,11.105) 88(1.625,11.105) 89(0.975,11.105) 90(0.325,11.105) 91(-0.325,11.105) 92(-0.975,11.105) 93(-1.625,11.105) 94(-2.275,11.105) 95(-2.925,11.105) 96(-3.575,11.105) 97(-4.225,11.105) 98(-4.875,11.105) 99(-5.525,11.105) 100(-6.175,11.105)
  silkscreen extent -8.23,-9.8 6.8,10.3
S558-5999-P3 [mil]
  rect 70x30 smd: 1(0,0)
  oval 70x30 smd: 2(0,-50) 3(0,-100) 4(0,-150) 5(0,-200) 6(0,-250) 7(0,-300) 8(0,-350) 9(0,-400) 10(0,-450) 11(0,-500) 12(0,-550) 13(575,-550) 14(575,-500) 15(575,-450) 16(575,-400) 17(575,-350) 18(575,-300) 19(575,-250) 20(575,-200) 21(575,-150) 22(575,-100) 23(575,-50) 24(575,0)
  silkscreen extent 70,-575 505,25
SCREW6-32 [mil] "6-32 screw"
  round 160 hole 140 paste-20 mask+30: 0(0,0)
  silkscreen extent -140,-140 140,140
"SMD _LED" [mm] "SMT LED; 2 Leads"
  rect 1.3x1.6 smd: 1(0.95,0) 2(-0.95,0)
  silkscreen extent -2.13,-1.15 2,1.15
SOT223-5/Simple [mil] "SOT-223 without large heatsink"
  rect 30x60 smd: 1(-100,0) 2(-50,0) 3(0,0) 4(50,0) 5(100,0)
  rect 100x140 smd: 3(0,196.85)
  silkscreen extent -140,60 140,200
TC7343-2917 [mm]
  rect 2.6x2.4 smd: 1(-3.2,0) 2(3.2,0)
  silkscreen extent -4.9,-1.6 4.4,1.6

## Part data
C1 C2 C3 C4 C5 C6 C7 C8 C9 C10 C11 C12 C13 C14 C15 C16 C17 C18 C19 C20 C21 C22 C23 C24 C25 C26 C27 C28 C29 C30 C32 C35 C36 C37 C38 C39 C40 C41 C42 C43 C44 C45 C46 C47 C48 C49 C50 C51 C52 C53 C54 C55 C56 C57 C58 C59 C60 C61 C62 C63 C64 C65 C66 C67 C68 C69 C70 C71 C72 C73 C74 C77 C80 C90 C91 C92 C93 C94 C95 C96 C97 C99: "Capacitor"
C31 C76 C98: "Standard Capacitor"
C33 C34: library part CAP, "Capacitor"
C75: library part Cap, "Capacitor"
C78 C86 C87 C88 C89: library part "Cap Pol1", "Polarized Capacitor (Radial)"
C79 C81 C82 C83 C84 C85: library part POLCAP2, "Standard Capacitor"
CONN1: library part CON68, "Moles 68-pin EBBI 50 mil right angle plug connector, same as U320 SCSI"
DS1 DS2 DS3 DS4 DS5 DS6 DS7 DS8 DS9 DS10 DS11: library part LED0, "Typical INFRARED GaAs LED"
FID1 FID2 FID3 FID4 FID5 FID6: "Fiducial"
J1: "RJ-45 connector"
JP1: "Header, 7-Pin, Dual row"
L1: "BEL 1000base-T magnetics S588-5999-P3"
O1: "ECS SMD Oscillator, ECS-3953M"
R1 R2 R3 R4 R5 R6 R7 R9 R11 R12 R13 R14 R15 R16 R17 R18 R23 R24 R25 R26 R28 R29 R30 R31 R35 R36 R37 R39 R40: library part Res1, "Resistor"
R8 R10 R19 R20 R21 R22 R27 R32 R33 R34: "Resistor"
R41 R42 R43 R44: "Standard Passive Resistor"
S1 S2 S3 S4: library part MNTSCREW
U1 U3 U4 U6: library part TPS795XX, "TI Ultra-low-noise LDO"
U2: "National Semiconductor Gigabit PHY"
U5: "Cypress NoBL Pipelined SRAM 128kx36"
U7: "Xilinx Spartan-3 PQ208"
Y1: library part CRYSTAL, "Crystal MA-506 25.000M-C0"

## Via types
v1: diameter 25, hole 13.5, Top Layer to Bottom Layer, 333 vias
v2: diameter 35, hole 20, Top Layer to Bottom Layer, 76 vias
v3: diameter 30, hole 20, Top Layer to Bottom Layer, 1 vias

## Nets (pads, with @x,y where several pads share a name; then routed paths per layer and width w, separated by ;. In a path a pad name is that pad's centre, name@x,y a point inside that pad or via, vN(x,y) a via of type N, cw(c..) or ccw(c..) an arc to the next point about the centre after c; other vN are vias at no path point)
"125 MHZ CLK": O1.3 U7.181 | length 1282.7
  Top Layer w10: O1.3@2645.35,5580 2645.35,5514.65 v1(2650,5510) ; U7.181@3076.5,4599.53 3139.53,4599.53 3160,4620 v1(3160,4630)
  MidLayer1 w10: v1(2650,5510) 2650,5110 3107.49,4652.51 3137.49,4652.51 v1(3160,4630)
+1.2VCC: C6.2 C7.2 C64.2 C65.2 C98.1 C99.2 U6.4 U6.5 U7.70 U7.88 U7.174 U7.192 | length 906
  Top Layer w10: U7.192@3076.5,4382.99 v1(3137.01,4382.99) ; U7.174@3076.5,4737.32 v1(3137.32,4737.32) ; v1(4190,4740) 4207.01,4757.01 U7.88@4263.5,4757.01 ; v1(4192.68,4402.68) U7.70@4263.5,4402.68
  Top Layer w16: v2@4344.88,3614.88 C99.2@4344.88,3540 4360,3524.88 U6.5@4360,3400 ; v2(4360,3460) 4400,3460 4410,3450 U6.4@4410,3400
  Top Layer w20: C98.1@4334.02,3720 4350,3704.02 v2(4350,3610)
  Bottom Layer w10: v1(3137.01,4382.99) 3140,4380 C65.2@3186.54,4380 ; v1(3137.32,4737.32) 3140,4740 C64.2@3200,4740 ; C6.2@4153.46,4400 4190,4400 v1(4192.68,4402.68) ; C7.2@4153.46,4740 v1(4190,4740)
+1.8VCC: C31.1 C40.1 C41.1 C42.1 C43.1 C44.1 C46.1 C47.1 C48.1 C49.1 C50.1 C71.2 C84.1 C85.1 R8.2 U1.4 U2.11 U2.19 U2.25 U2.35 U2.48 U2.63 U2.73 U2.92 U2.100 U2.103 U2.105 U2.111 U2.117 U2.123 | length 2488.2
  Top Layer w10: v1(4730,4490) 4740.95,4500.95 U2.63@4795.04,4500.95 ; U2.48@4795.04,4796.22 4843.78,4796.22 v1(4860,4780) ; U2.35@4940.71,5060 4940.71,4999.29 v1(4960,4980) ; U2.73@5039.14,4394.65 5040,4395.51 v1(5040,4460) ; v1(5137.56,4997.56) U2.25@5137.56,5060 ; v1(5255.67,4994.33) U2.19@5255.67,5060 ; U2.92@5413.15,4394.65 5413.15,4443.15 v1(5430,4460) ; v1(5413.15,5003.15) U2.11@5413.15,5060 ; U2.100@5570.63,4394.65 v1(5570.63,4459.37) ; v1(5630,4660) 5651.26,4638.74 U2.111@5696.61,4638.74 ; v1(5640,4740) 5656.85,4756.85 U2.117@5696.61,4756.85 ; v1(5645.04,4874.96) U2.123@5696.61,4874.96 ; U2.103@5696.61,4481.26 v1(5638.74,4481.26) 5638.74,4518.74 5640.63,4520.63 U2.105@5696.61,4520.63
  Top Layer w16: U1.4@4530,5430 U1.4@4540,5420 4540,5380 4565.12,5354.88 ; v1(5620,4080) R8.2@5620,4126.54
  Top Layer w20: 4565.12,5354.88 4595.12,5354.88 v2(4630,5320) ; C31.1@4625.98,5200 4625.98,5315.98 4674.88,5364.88 C71.2@4700,5364.88
  Bottom Layer w8: 5413.15,5060 5870.3,5060
  Bottom Layer w20: v1(4730,4490) 4776.54,4490 C43.1@4780,4493.46 ; C42.1@4800,4773.46 4806.54,4780 v1(4860,4780) ; v1(4960,4980) 4993.46,4980 C41.1@5020,4953.46 ; C44.1@5000,4486.54 5013.46,4486.54 v1(5040,4460) ; C40.1@5400,4953.46 5400,4990 v1(5413.15,5003.15) ; v1(5430,4460) 5453.46,4460 C46.1@5480,4486.54 ; 5500,4480 5550,4480 v1(5570.63,4459.37) ; C47.1@5610,4520 5610,4510 v1(5638.74,4481.26) ; C49.1@5610,4880 5640,4880 v1(5645.04,4874.96) ; v1(5630,4660) 5630,4696.54 C48.1@5600,4726.54 5613.46,4740 v1(5640,4740)
+2.5VCC: C1.2 C2.2 C3.2 C4.2 C5.2 C62.2 C63.2 C75.1 C77.2 C94.2 C95.2 C96.2 U3.4 U7.17 U7.38 U7.69 U7.89 U7.121 U7.142 U7.173 U7.193 | length 1244.9
  Top Layer w10: v1@3020,4380 3036.69,4363.31 U7.193@3076.5,4363.31 ; U7.173@3076.5,4757.01 3117.01,4757.01 v1(3150,4790) ; v1(3443.62,5103.62) U7.142@3443.62,5163.5 ; U7.17@3482.99,3976.5 v1(3482.99,4042.99) ; v1(3850,5100) 3857.01,5107.01 U7.121@3857.01,5163.5 ; U7.38@3896.38,3976.5 v1(3896.38,4036.38) ; v1(4180,4340) 4222.99,4382.99 U7.69@4263.5,4382.99 ; v1(4190,4800) 4213.31,4776.69 U7.89@4263.5,4776.69
  Top Layer w16: U3.4@3850,3410 v2(3850,3470) 3854.88,3474.88 3854.88,3584.88 v2(3870,3600) C75.1@3870,3680
  Bottom Layer w10: C3.2@3420,5053.46 3420,5080 v1(3443.62,5103.62) ; v1(3482.99,4042.99) 3496.77,4029.21 C94.2@3496.77,3976.5 ; C4.2@3820,5053.46 3850,5083.46 v1(3850,5100) ; v1(3896.38,4036.38) 3910,4050 C63.2@3910,4060 ; C62.2@4153.46,4300 4180,4326.54 v1(4180,4340) ; C5.2@4153.46,4840 4190,4803.46 v1(4190,4800)
  Bottom Layer w16: v1(3150,4790) 3150,4800 C1.2@3180,4830
  other v1: 3020,4370
+2.5VPHY: C15.2 C16.2 C19.1 C20.1 C21.1 C22.1 C23.2 C24.2 C25.2 C26.2 C87.1 C89.2 L1.1 L1.4 L1.7 L1.10 R9.2 R11.2 R12.2 R13.2 R14.2 R15.2 R16.2 R17.2 U2.96 U2.101 U4.4 | length 2068.1
  Top Layer w8: U2.96@5491.89,4394.65 5491.89,4201.57 5493.46,4200 v1(5540,4200) ; U2.101@5590.31,4394.65 5590.31,4349.69 5720,4220 C16.2@5720,4193.46
  Top Layer w16: v2(5548.88,3224.88) C89.2@5620,3224.88 5643.12,3248 v2(5688,3248) 5690,3250 U4.4@5740,3250
  Top Layer w20: C87.1@5435,3245 5528.76,3245 v2(5548.88,3224.88) ; v1(5870,4390) R11.2@5906.54,4390 ; v1(5870,4490) R9.2@5906.54,4490 ; v1(5870,4590) R12.2@5906.54,4590 ; v1(5870,4690) R13.2@5906.54,4690 ; v1(5870,4790) R14.2@5906.54,4790 ; v1(5870,4890) R15.2@5906.54,4890 ; v1(5870,4990) R16.2@5906.54,4990 ; v1(5870,5090) R17.2@5906.54,5090 ; L1.10@6150,4580 6210,4580 v2(6240,4550) ; L1.7@6150,4730 v2(6240,4730) ; L1.4@6150,4880 v2(6240,4880) ; L1.1@6160,5030 v2(6240,5030)
  Bottom Layer w20: v1(5870,4490) 5906.54,4453.46 C20.1@5906.54,4440 ; v1(5870,4690) 5906.54,4653.46 C21.1@5906.54,4640 ; v1(5870,4890) 5906.54,4853.46 C22.1@5906.54,4840 ; v1(5870,5090) 5906.54,5053.46 C19.1@5906.54,5040 ; C26.2@6160,4553.46 6163.46,4550 v2(6240,4550) ; C25.2@6160,4713.46 6176.54,4730 v2(6240,4730) ; C24.2@6160,4873.46 6233.46,4873.46 v2(6240,4880) ; C23.2@6160,5033.46 6236.54,5033.46 v2(6240,5030)
  other v1: 5659.49,4280.51
A0: U5.37 U7.171 | length 1423.5
  Top Layer w8: U5.37@3072.79,5969.57 2999.57,5969.57 2890,5860 2890,4890 2983.62,4796.38 U7.171@3076.5,4796.38
A1: U5.36 U7.172 | length 1499.8
  Top Layer w8: U5.36@3072.79,5995.16 2995.16,5995.16 2870,5870 2870,4870 2963.31,4776.69 U7.172@3076.5,4776.69
A2: U5.35 U7.175 | length 1592.4
  Top Layer w8: U5.35@3072.79,6020.75 2990.75,6020.75 2850,5880 2850,4850 2982.36,4717.64 U7.175@3076.5,4717.64
A3: U5.34 U7.176 | length 1694.6
  Top Layer w8: U5.34@3072.79,6046.34 2976.34,6046.34 2820,5890 2820,4820 2942.05,4697.95 U7.176@3076.5,4697.95
A4: U5.33 U7.178 | length 1787.4
  Top Layer w8: U5.33@3072.79,6071.93 2961.93,6071.93 2790,5900 2790,4820 2951.42,4658.58 U7.178@3076.5,4658.58
A5: U5.32 U7.180 | length 1942.1
  Top Layer w8: U5.32@3072.8,6097.52 2947.52,6097.52 2770,5920 2770,4690 2840.79,4619.21 U7.180@3076.5,4619.21
A6: U5.100 U7.161 | length 1791.5
  Top Layer w10: v1(3020,5130) 3020,5010 3036.77,4993.23 U7.161@3076.5,4993.23 ; v1(3883.11,6123.11) U5.100@3947.21,6123.11
  Bottom Layer w8: v1(3020,5130) 3020,5590 3250,5820 3560,5820 3863.11,6123.11 v1(3883.11,6123.11)
A7: U5.99 U7.162 | length 1813.9
  Top Layer w8: v1(3050,5240) 2990,5180 2990,5010 3026.46,4973.54 U7.162@3076.5,4973.54 ; v1(3880,6090) 3887.52,6097.52 U5.99@3947.21,6097.52
  Bottom Layer w8: v1(3050,5240) 3050,5590 3250,5790 3580,5790 v1(3880,6090)
A8: U5.82 U7.165 | length 1636.6
  Top Layer w8: U7.165@3076.5,4914.49 3224.49,4914.49 v1(3320,5010) ; U5.82@3947.21,5662.48 v1(4017.52,5662.48)
  Bottom Layer w8: v1(3320,5010) 3320,5120 3370,5170 3950,5170 4020,5240 4020,5660 v1(4017.52,5662.48)
A9: U5.81 U7.166 | length 1664.9
  Top Layer w8: U7.166@3076.5,4894.8 3244.8,4894.8 3350,5000 v1(3350,5050) ; U5.81@3947.21,5636.89 3983.11,5636.89 v1(4050,5570)
  Bottom Layer w8: v1(3350,5050) 3350,5120 3380,5150 3990,5150 4050,5210 v1(4050,5570)
A10: U5.44 U7.169 | length 1181.6
  Top Layer w8: U5.44@3072.79,5790.43 3010.43,5790.43 2910,5690 2910,4910 2984.25,4835.75 U7.169@3076.5,4835.75
A11: U5.45 U7.168 | length 1111.2
  Top Layer w8: U5.45@3072.79,5764.84 3014.84,5764.84 2930,5680 2930,4920 2994.57,4855.43 U7.168@3076.5,4855.43
A12: U5.46 U7.167 | length 1040.7
  Top Layer w8: U5.46@3072.79,5739.25 3019.25,5739.25 2950,5670 2950,4930 3004.88,4875.12 U7.167@3076.5,4875.12
A13: U5.47 U7.156 | length 703.5
  Top Layer w8: U5.47@3072.79,5713.66 3023.66,5713.66 2970,5660 2970,5430 3168.03,5231.97 U7.156@3168.03,5163.5
A14: U5.48 U7.155 | length 667
  Top Layer w8: U5.48@3072.79,5688.07 3028.07,5688.07 2990,5650 2990,5440 3187.72,5242.28 U7.155@3187.72,5163.5
A15: U5.49 U7.154 | length 630.4
  Top Layer w8: U5.49@3072.79,5662.48 3032.48,5662.48 3010,5640 3010,5450 3207.4,5252.6 U7.154@3207.4,5163.5
A16: U5.50 U7.152 | length 545.4
  Top Layer w8: U5.50@3072.79,5636.89 3072.79,5417.21 3246.77,5243.23 U7.152@3246.77,5163.5
CCLK: CONN1.56 R37.2 | length 1265.7
  Top Layer w10: v1(2660,3170) 2890,3170 3020,3300 R37.2@3020,3346.54
  MidLayer1 w16: CONN1.56@1950,3400 2180,3170 v1(2660,3170)
CGND: C27.1 C29.2 C70.2 J1.9 | length 460.6
  Top Layer w16: v1(7074.88,4235.12) v1(7205.12,4235.12) ; v1(7074.88,5144.88) v1(7225.12,5144.88) ; C29.2@7140,4235.12 v1(7140,4300) ; v1(7140,5080) C70.2@7140,5144.88
  Top Layer w20: v1(6850,4260) C27.1@6886.54,4260
  Bottom Layer w8: v1@7070,5140 v1(7074.88,5144.88) ; v1(7225.12,5144.88) v1@7230,5140
CLK: U5.89 U7.106 | length 822.3
  Top Layer w8: U5.89@3947.21,5841.61 4048.39,5841.61 4152.28,5737.72 U7.106@4152.28,5163.5
COL: U2.39 U7.102 | length 556.1
  Top Layer w8: U7.102@4263.5,5032.6 4420,5032.6 4442.6,5010 4640,5010 4676.61,4973.39 U2.39@4795.04,4973.39
CRS: U2.40 U7.97 | length 539.6
  Top Layer w8: U7.97@4263.5,4934.17 4650.47,4934.17 4670,4953.7 U2.40@4795.04,4953.7
DIN: CONN1.55 R40.2 | length 1451.5
  Top Layer w10: v1(3050,3260) 3080,3290 R40.2@3080,3350
  MidLayer1 w10: 2590,3510 2660,3510 2910,3260 v1(3050,3260)
  MidLayer1 w16: CONN1.55@1850,3400 1900,3450 2090,3450 2150,3510 2590,3510
DIN0: CONN1.3 U7.182 | length 2031.1
  Top Layer w10: CONN1.3@1950,6000 2500,5450 2500,4910 2830.16,4579.84 U7.182@3076.5,4579.84
DIN1: CONN1.4 U7.184 | length 2158.8
  Top Layer w10: CONN1.4@1850,6000 1900,5950 1960,5950 2470,5440 2470,4880.47 2810,4540.47 U7.184@3076.5,4540.47
DIN2: CONN1.5 U7.185 | length 2031.2
  Top Layer w10: CONN1.5@1950,5900 2440,5410 2440,4840.79 2760,4520.79 U7.185@3076.5,4520.79
DIN3: CONN1.6 U7.187 | length 2158.9
  Top Layer w10: CONN1.6@1850,5900 1900,5850 1970,5850 2410,5410 2410,4821.42 2750,4481.42 U7.187@3076.5,4481.42
DIN4: CONN1.8 U7.189 | length 2134.6
  Top Layer w10: CONN1.8@1850,5800 1900,5750 2020,5750 2380,5390 2380,4800 2737.95,4442.05 U7.189@3076.5,4442.05
DIN5: CONN1.9 U7.190 | length 1988.2
  Top Layer w10: CONN1.9@1950,5700 1990,5700 2350,5340 2350,4772.36 2700,4422.36 U7.190@3076.5,4422.36
DIN6: CONN1.10 U7.191 | length 2103.6
  Top Layer w10: CONN1.10@1850,5700 1900,5650 1990,5650 2320,5320 2320,4740 2657.32,4402.68 U7.191@3076.5,4402.68
DIN7: CONN1.11 U7.194 | length 1992.5
  Top Layer w10: CONN1.11@1950,5600 1990,5600 2290,5300 2290,4710 2656.38,4343.62 U7.194@3076.5,4343.62
DIN8: CONN1.13 U7.196 | length 1938.1
  Top Layer w10: CONN1.13@1950,5500 1980,5500 2260,5220 2260,4680 2635.75,4304.25 U7.196@3076.5,4304.25
DIN9: CONN1.14 U7.197 | length 2034.6
  Top Layer w10: CONN1.14@1850,5500 1900,5450 1970,5450 2230,5190 2230,4670 2615.43,4284.57 U7.197@3076.5,4284.57
DIN10: CONN1.15 U7.198 | length 1901.3
  Top Layer w10: CONN1.15@1950,5400 1980,5400 2200,5180 2200,4660 2595.12,4264.88 U7.198@3076.5,4264.88
DIN11: CONN1.16 U7.199 | length 2003.6
  Top Layer w10: CONN1.16@1850,5400 1898.5,5351.5 1978.5,5351.5 2170,5160 2170,4650 2574.8,4245.2 U7.199@3076.5,4245.2
DIN12: CONN1.18 U7.200 | length 1976.2
  Top Layer w10: CONN1.18@1850,5300 1900,5250 2040,5250 2140,5150 2140,4630 2544.49,4225.51 U7.200@3076.5,4225.51
DIN13: CONN1.19 U7.203 | length 1847.5
  Top Layer w10: CONN1.19@1950,5200 2030,5200 2110,5120 2110,4620 2563.54,4166.46 U7.203@3076.5,4166.46
DIN14: CONN1.20 U7.204 | length 1953.9
  Top Layer w10: CONN1.20@1860,5200 CONN1.20@1850,5200 1900,5150 2010,5150 2080,5080 2080,4600 2533.23,4146.77 U7.204@3076.5,4146.77
DIN15: CONN1.21 U7.205 | length 1776.1
  Top Layer w10: CONN1.21@1950,5100 2050,5000 2050,4590 2512.91,4127.09 U7.205@3082.91,4127.09
DINEN: CONN1.28 U7.28 | length 2286.7
  Top Layer w10: U7.28@3699.53,3976.5 v1(3699.53,4138.26)
  Bottom Layer w10: CONN1.28@1850,4800 1900,4750 2140,4750 2360,4530 3310,4530 3699.53,4140.47 v1(3699.53,4138.26)
DOUT0: CONN1.30 U7.27 | length 2209.5
  Top Layer w10: v1(3660,4140) 3679.84,4120.16 U7.27@3679.84,3976.5
  Bottom Layer w10: CONN1.30@1850,4690 1890,4650 2170,4650 2330,4490 3050,4490 3110,4430 3370,4430 v1(3660,4140)
DOUT1: CONN1.31 U7.26 | length 1999.5
  Top Layer w10: v1(3650,4080) 3660,4070 U7.26@3660,4000
  Bottom Layer w10: CONN1.31@1950,4600 2150,4600 2290,4460 2990,4460 3100,4350 3152.88,4350 3172.88,4330 3400,4330 v1(3650,4080)
DOUT2: CONN1.32 U7.24 | length 2077.5
  Top Layer w10: U7.24@3620.79,3976.5 v1(3620.79,4059.21)
  Bottom Layer w10: CONN1.32@1850,4600 1900,4550 2090,4550 2210,4430 2900,4430 2990,4340 3060,4340 3120,4280 3400,4280 v1(3620.79,4059.21)
DOUT3: CONN1.33 U7.22 | length 1879.3
  Top Layer w10: U7.22@3581.42,3976.5 v1(3581.42,4058.58)
  Bottom Layer w10: CONN1.33@1970,4500 2070,4500 2170,4400 2880,4400 3020,4260 3385,4260 3581.42,4063.58 v1(3581.42,4058.58)
DOUT4: CONN1.35 U7.21 | length 1826.7
  Top Layer w10: v1(3540,4065.73) 3561.73,4044 U7.21@3561.73,3976.5
  Bottom Layer w10: CONN1.35@1950,4400 2050,4400 2090,4360 2880,4360 3000,4240 3365.73,4240 v1(3540,4065.73)
DOUT5: CONN1.36 U7.20 | length 1897.6
  Top Layer w10: v1(3400,4150) 3420,4150 3542.05,4027.95 U7.20@3542.05,3976.5
  Bottom Layer w10: CONN1.36@1850,4400 1900,4350 2040,4350 2100,4290 2840,4290 2980,4150 v1(3400,4150)
DOUT6: CONN1.37 U7.7 | length 1614.5
  Top Layer w10: v1@3270,4120 3270,4130 3286.14,4113.86 U7.7@3286.14,3976.5
  Bottom Layer w8: CONN1.37@1950,4300 2060,4300 2300,4060 3170,4060 3230,4120 v1@3270,4120
  other v1: 3280,4120
DOUT7: CONN1.38 U7.9 | length 1751
  Top Layer w10: U7.9@3325.51,3976.5 3325.51,4075.51 v1(3330,4080)
  Bottom Layer w8: CONN1.38@1850,4300 1900,4250 2050,4250 2310,3990 3180,3990 3270,4080 v1(3330,4080)
DOUT8: CONN1.40 U7.10 | length 1740.5
  Top Layer w10: U7.10@3345.2,3976.5 3345.2,4025.2 v1(3370,4050)
  Bottom Layer w8: CONN1.40@1850,4200 1900,4150 2100,4150 2290,3960 3180,3960 3270,4050 v1(3370,4050)
DOUT9: CONN1.41 U7.11 | length 1567.9
  Top Layer w10: CONN1.41@1950,4100 1990,4100 2200,3890 3330,3890 3364.88,3924.88 U7.11@3364.88,3976.5
DOUT10: CONN1.42 U7.12 | length 1716.1
  Top Layer w10: CONN1.42@1850,4100 1900,4050 1970,4050 2150,3870 3350,3870 3384.57,3904.57 U7.12@3384.57,3976.5
DOUT11: CONN1.43 U7.13 | length 1617
  Top Layer w10: CONN1.43@1950,4000 2100,3850 3360,3850 3404.25,3894.25 U7.13@3404.25,3976.5
DOUT12: CONN1.45 U7.15 | length 1651.8
  Top Layer w10: CONN1.45@1950,3900 2010,3900 2090,3820 3390,3820 3443.62,3873.62 U7.15@3443.62,3976.5
DOUT13: CONN1.46 U7.16 | length 1814.1
  Top Layer w10: CONN1.46@1850,3900 1900,3850 1970,3850 2030,3790 3410,3790 3463.31,3843.31 U7.16@3463.31,3976.5
DOUT14: CONN1.47 U7.18 | length 1731.5
  Top Layer w10: CONN1.47@1950,3800 1990,3760 3410,3760 3502.68,3852.68 U7.18@3502.68,3976.5
DOUT15: CONN1.48 U7.19 | length 1896.2
  Top Layer w10: CONN1.48@1850,3800 1900,3750 1970,3750 2000,3720 3410,3720 3522.36,3832.36 U7.19@3522.36,3976.5
DOUTEN: CONN1.24 U7.33 | length 2748.6
  Top Layer w10: U7.33@3797.95,3976.5 3797.95,4017.95 3850,4070 v1(3860,4070)
  MidLayer1 w10: CONN1.24@1850,5000 1895,4955 1895,4885 1930,4850 2350,4850 2930,4270 3610,4270 3810,4070 v1(3860,4070)
  Bottom Layer w8: CONN1.24@1850,5000 1900,4950 1900,4890 1940,4850
DQ0: U5.52 U7.150 | length 447.8
  Top Layer w8: U5.52@3164.53,5550 3164.53,5375.47 3286.14,5253.86 U7.150@3286.14,5163.5
  Top Layer w10: U5.52@3164.53,5550 U5.52@3164.53,5560.9
DQ1: U5.53 U7.149 | length 445.3
  Top Layer w8: U5.53@3190.12,5560.9 3190.12,5379.88 3305.83,5264.17 U7.149@3305.83,5163.5
DQ2: U5.56 U7.146 | length 438
  Top Layer w8: U5.56@3266.89,5560.9 3266.89,5443.11 3364.88,5345.12 U7.146@3364.88,5163.5
DQ3: U5.57 U7.144 | length 443.7
  Top Layer w8: U5.57@3292.48,5560.9 3292.48,5457.52 3404.25,5345.75 U7.144@3404.25,5163.5
DQ4: U5.58 U7.143 | length 429.5
  Top Layer w8: U5.58@3320,5550 3320,5460 3423.94,5356.06 U7.143@3423.94,5163.5
DQ5: U5.59 U7.141 | length 447
  Top Layer w8: U5.59@3343.66,5560.9 3343.66,5476.34 3444.34,5375.66 3444.34,5255.66 3463.31,5236.69 U7.141@3463.31,5163.5
DQ6: U5.62 U7.135 | length 464.1
  Top Layer w8: U5.62@3420.43,5560.9 3420.43,5469.57 3581.42,5308.58 U7.135@3581.42,5163.5
DQ7: U5.63 U7.133 | length 469.8
  Top Layer w8: U5.63@3446.02,5560.9 3446.02,5473.98 3620.79,5299.21 U7.133@3620.79,5163.5
DQ8: U5.68 U7.130 | length 441.3
  Top Layer w8: U5.68@3573.98,5560.9 3573.98,5466.02 3679.84,5360.16 U7.130@3679.84,5163.5
DQ9: U5.69 U7.128 | length 447
  Top Layer w8: U5.69@3599.57,5560.9 3599.57,5470.43 3719.21,5350.79 U7.128@3719.21,5163.5
DQ10: U5.72 U7.124 | length 447.8
  Top Layer w8: U5.72@3676.34,5560.9 3676.34,5463.66 3797.95,5342.05 U7.124@3797.95,5163.5
DQ11: U5.73 U7.123 | length 445.3
  Top Layer w8: U5.73@3701.93,5560.9 3701.93,5468.07 3817.64,5352.36 U7.123@3817.64,5163.5
DQ12: U5.74 U7.122 | length 442.9
  Top Layer w8: U5.74@3727.52,5560.9 3727.52,5472.48 3837.32,5362.68 U7.122@3837.32,5163.5
DQ13: U5.75 U7.120 | length 448.6
  Top Layer w8: U5.75@3753.11,5560.9 3753.11,5476.89 3859.64,5370.36 3859.64,5240.36 3876.69,5223.31 U7.120@3876.69,5163.5
DQ14: U5.78 U7.114 | length 465.7
  Top Layer w8: U5.78@3829.88,5560.9 3829.88,5480.12 3994.8,5315.2 U7.114@3994.8,5163.5
DQ15: U5.79 U7.113 | length 463.3
  Top Layer w8: U5.79@3855.47,5560.9 3855.47,5484.53 4014.49,5325.51 U7.113@4014.49,5163.5
DQ16: U5.2 U7.109 | length 1170.6
  Top Layer w8: U5.2@3855.47,6199.1 3855.47,5876.02 3870,5861.49 3870,5820 3840,5790 3840,5750 3880,5710 3880,5640 3930,5590 3950,5590 4093.23,5446.77 U7.109@4093.23,5163.5
DQ17: U5.3 U7.111 | length 1128.4
  Top Layer w8: U5.3@3829.88,6199.1 3829.88,5850.12 v1(3840,5840) ; v1(3940,5550) 3940,5540 4053.86,5426.14 U7.111@4053.86,5163.5
  Bottom Layer w8: v1(3840,5840) 3940,5740 v1(3940,5550)
DQ18: U5.6 U7.115 | length 1127.5
  Top Layer w8: U5.6@3753.11,6199.1 3753.11,5906.89 v1(3800,5860) ; v1(3970,5300) 3975.12,5294.88 U7.115@3975.12,5163.5
  Bottom Layer w8: v1(3800,5860) 3800,5800 3910,5690 3910,5530 3970,5470 v1(3970,5300)
DQ19: U5.7 U7.116 | length 1130
  Top Layer w8: U5.7@3727.52,6199.1 3727.52,5882.48 3820,5790 v1(3820,5730) ; v1(3920,5300) 3955.43,5264.57 U7.116@3955.43,5163.5
  Bottom Layer w8: v1(3820,5730) 3880,5670 3880,5510 3920,5470 v1(3920,5300)
DQ20: U5.8 U7.117 | length 1132.4
  Top Layer w8: U5.8@3701.93,6199.1 3701.93,5858.07 3780,5780 3780,5720 v1(3850,5650) ; v1(3920,5240) 3935.75,5224.25 U7.117@3935.75,5163.5
  Bottom Layer w8: v1(3850,5650) 3850,5490 3880.63,5459.37 3880.63,5279.37 v1(3920,5240)
DQ21: U5.9 U7.119 | length 1161.9
  Top Layer w8: U5.9@3676.34,6199.1 3676.34,5813.66 3740,5750 v1(3740,5690) ; v1(3840,5430) 3896.38,5373.62 U7.119@3896.38,5163.5
  Bottom Layer w8: v1(3740,5690) 3740,5470 3780,5430 v1(3840,5430)
DQ22: U5.12 U7.125 | length 1117.9
  Top Layer w8: U5.12@3599.57,6199.1 3599.57,5810.43 3700,5710 v1(3700,5650) ; v1(3770,5290) 3778.27,5281.73 U7.125@3778.27,5163.5
  Bottom Layer w8: v1(3700,5650) 3700,5460 3780,5380 3780,5300 v1(3770,5290)
DQ23: U5.13 U7.126 | length 1120.3
  Top Layer w8: U5.13@3573.98,6199.1 3573.98,5736.02 v1(3630,5680) ; v1(3750,5350) 3740,5340 3740,5250 3758.58,5231.42 U7.126@3758.58,5163.5
  Bottom Layer w8: v1(3630,5680) 3670,5640 3670,5430 v1(3750,5350)